# EAGLE board SparkFun_XBee_Development_Board-Panel (EAGLE 9.6.2), part 1 of 3
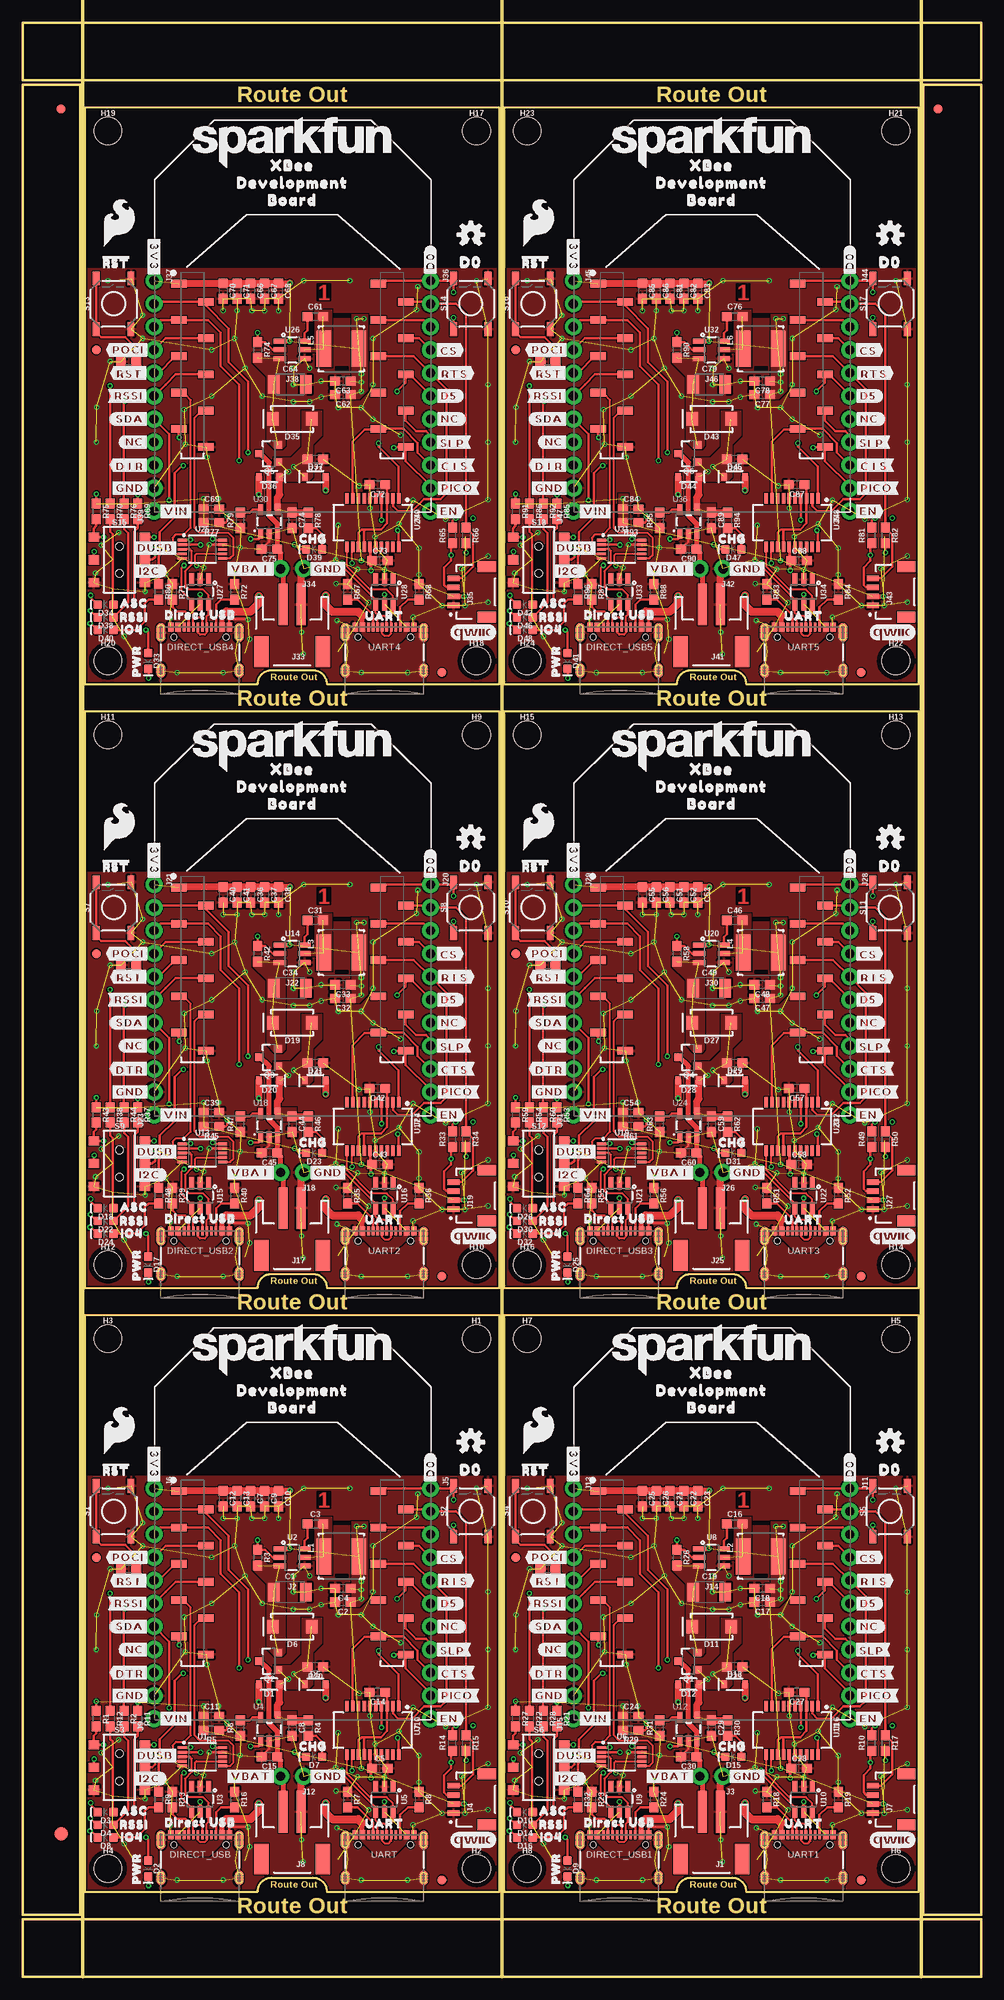
[diagram p0: board, top side]
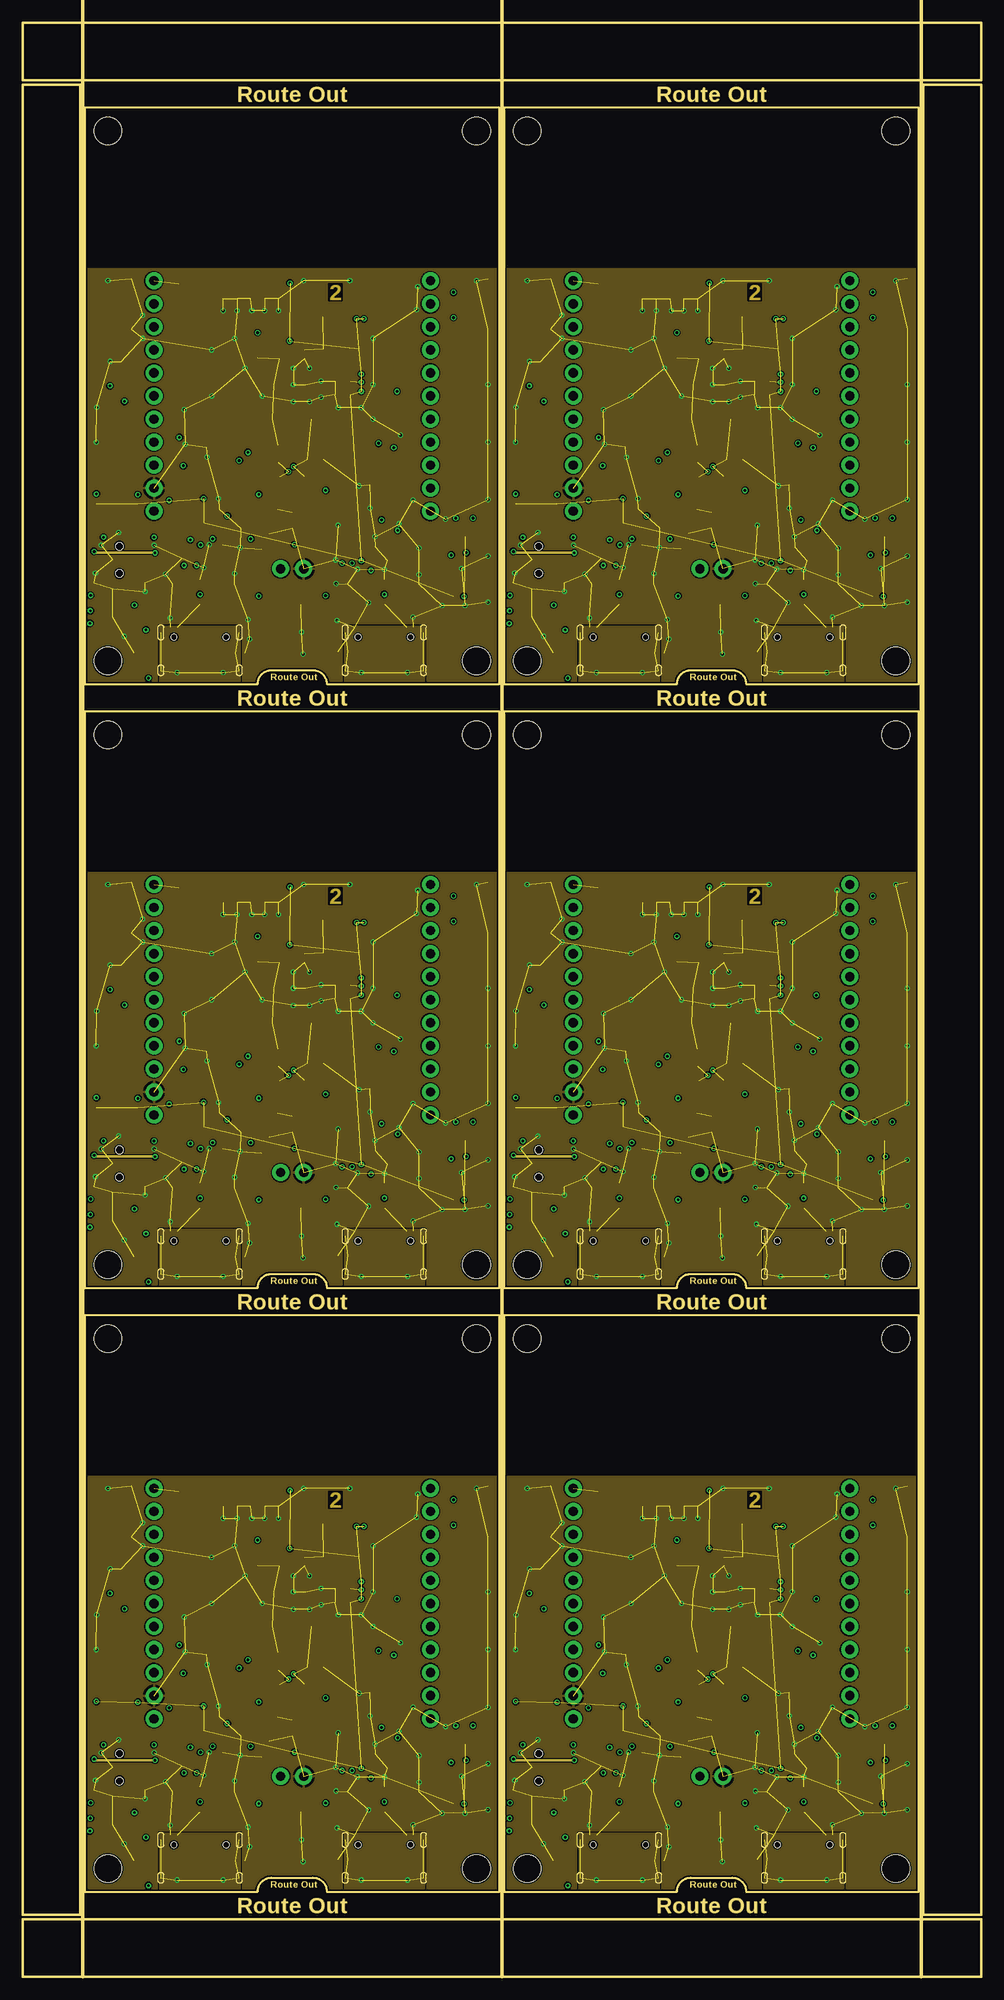
[diagram p1: board, inner layer Route2]
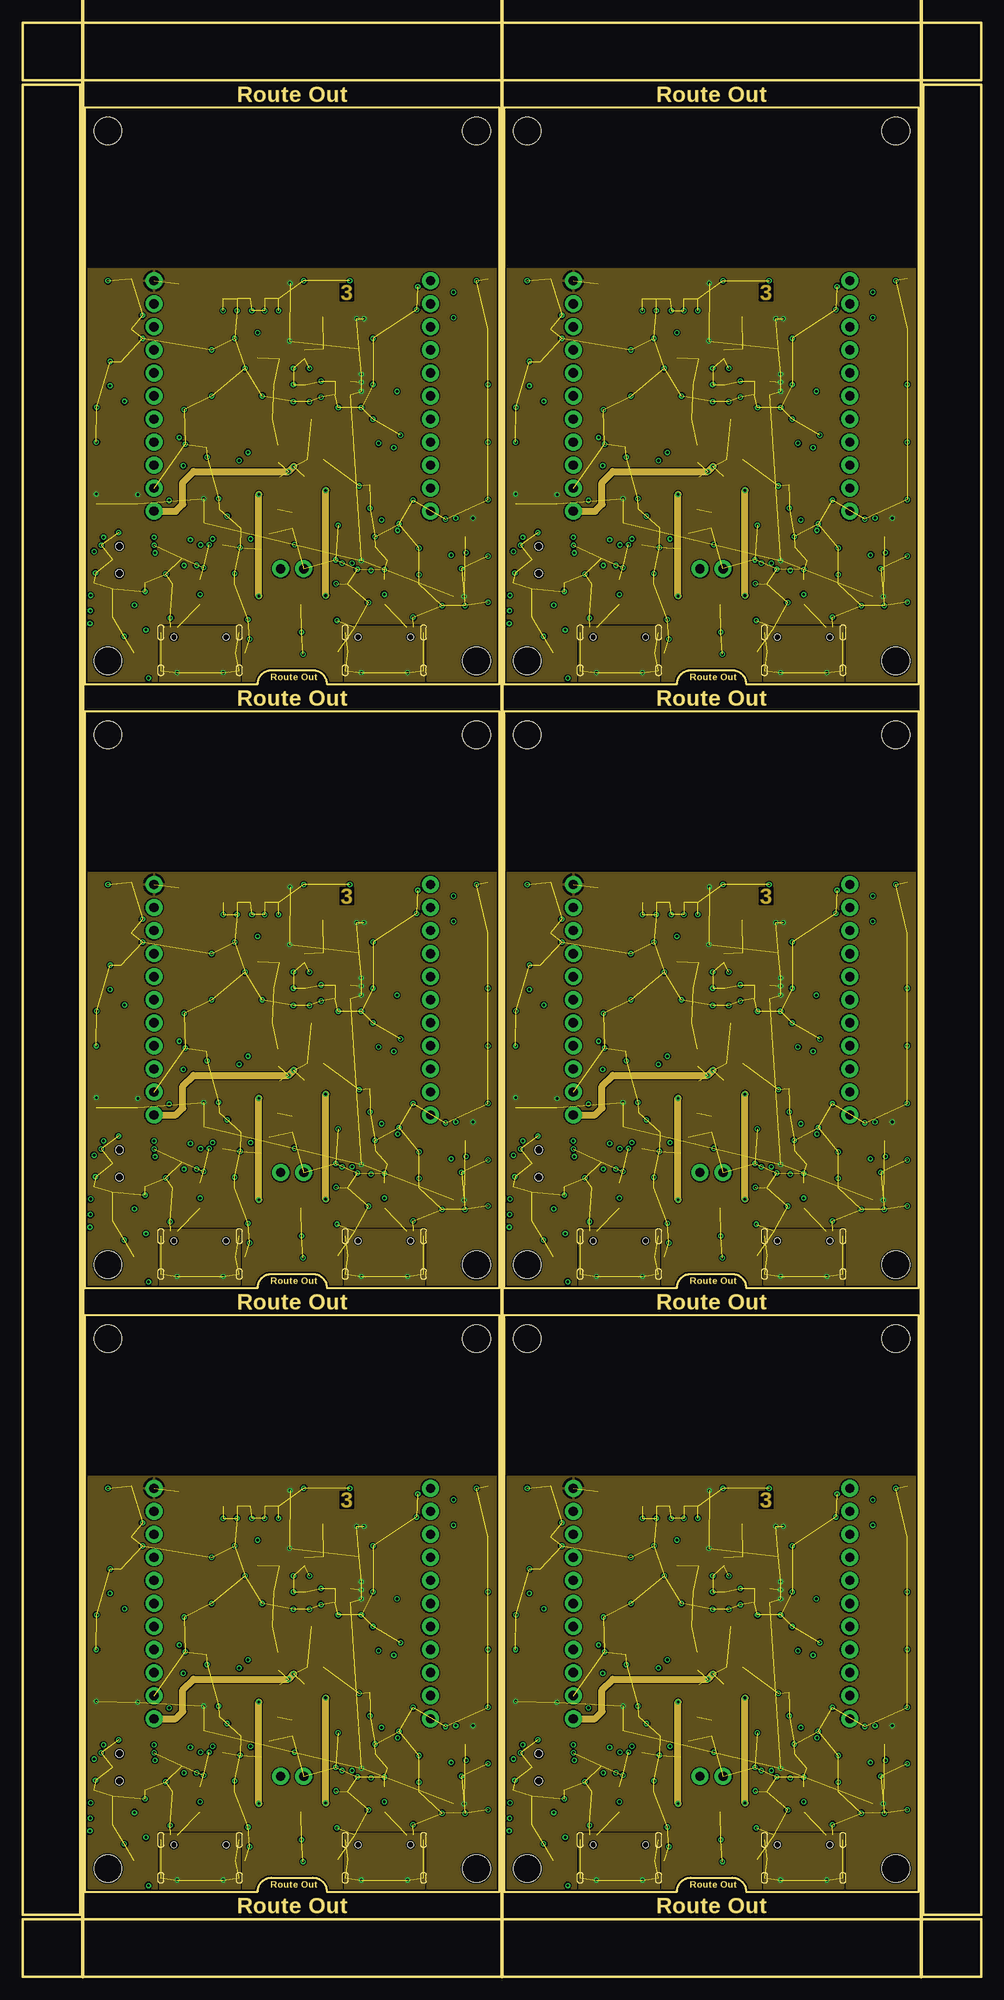
[diagram p2: board, inner layer Route15]
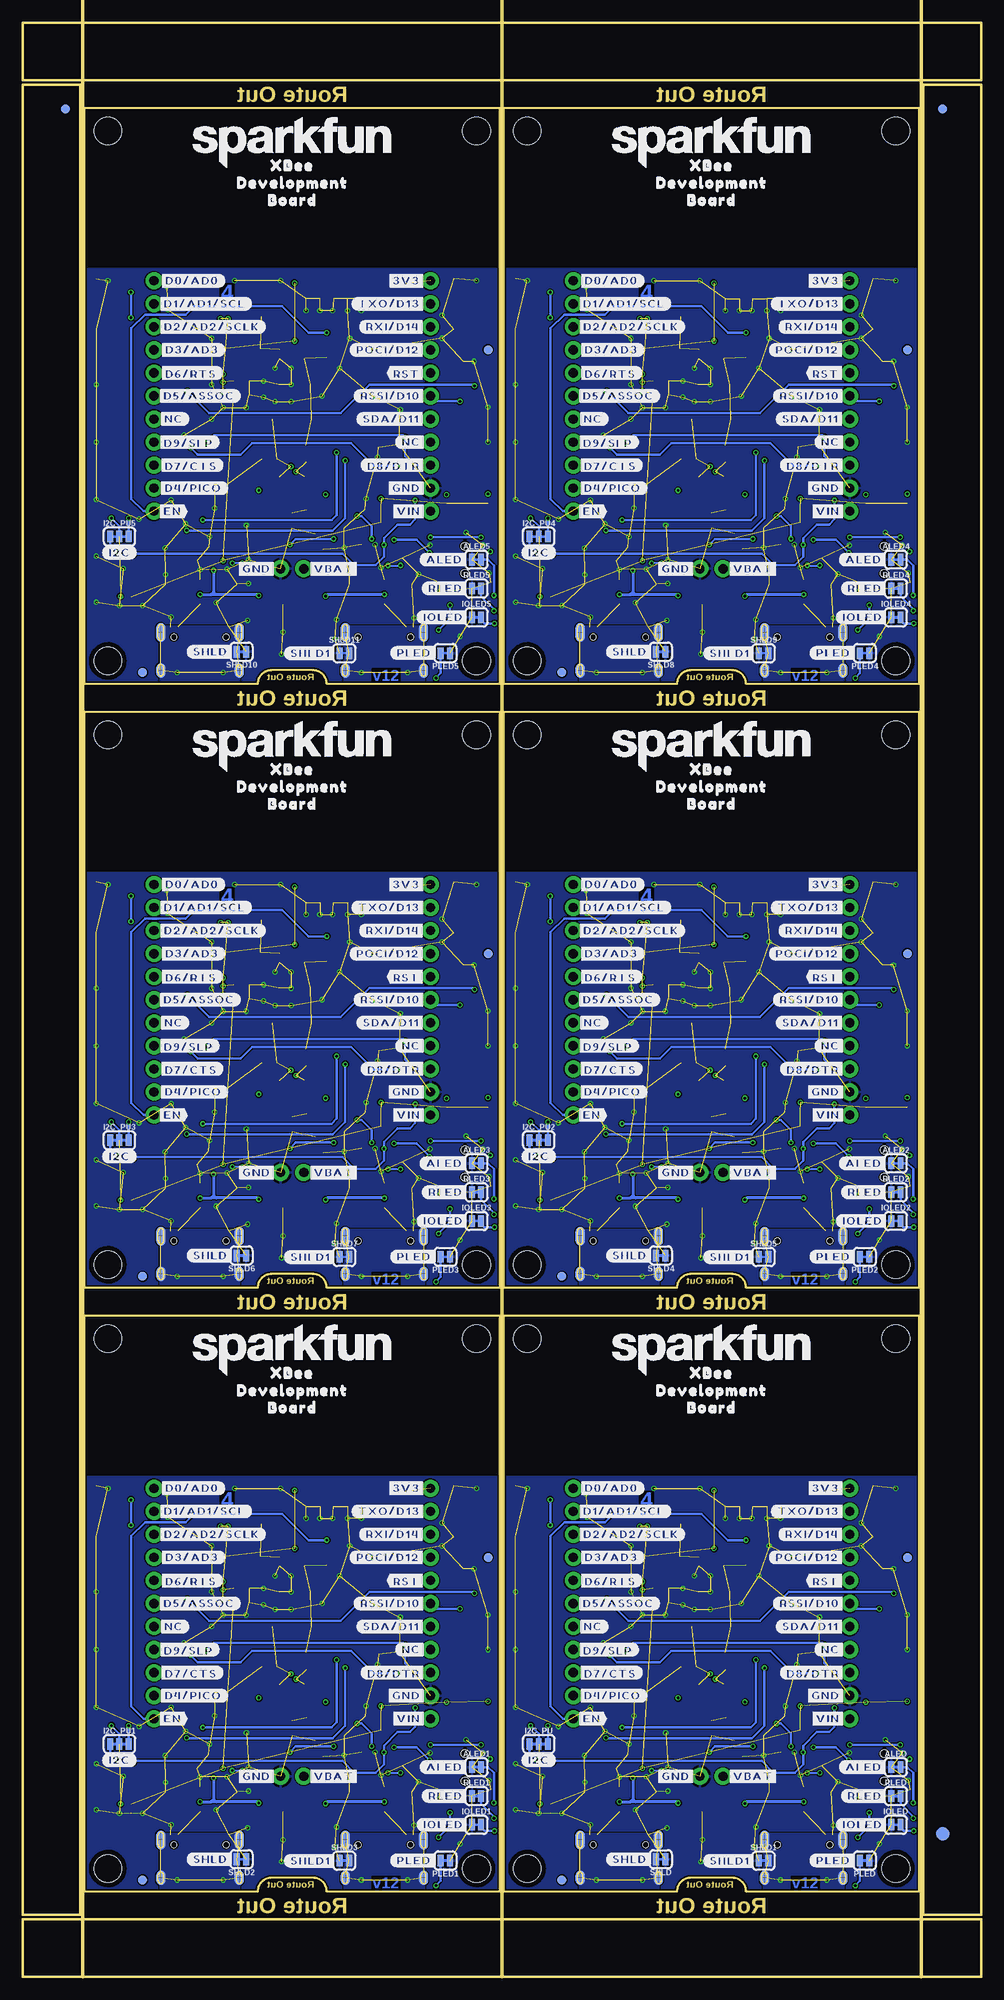
[diagram p3: board, bottom side, seen from below]

Size 105.66 x 215.39 mm. Coordinates in mm from the lower left corner, seen from the top.
Outline: 6.86,72.9 6.86,9.4 25.91,9.4 arc-90 27.43,10.92 32,10.92 arc-90 33.53,9.4 52.58,9.4 52.58,72.9 6.86,72.9
Outline: 53.09,72.9 53.09,9.4 72.14,9.4 arc-90 73.66,10.92 78.23,10.92 arc-90 79.76,9.4 98.81,9.4 98.81,72.9 53.09,72.9
Outline: 6.86,139.45 6.86,75.95 25.91,75.95 arc-90 27.43,77.47 32,77.47 arc-90 33.53,75.95 52.58,75.95 52.58,139.45 6.86,139.45
Outline: 53.09,139.45 53.09,75.95 72.14,75.95 arc-90 73.66,77.47 78.23,77.47 arc-90 79.76,75.95 98.81,75.95 98.81,139.45 53.09,139.45
Outline: 6.86,205.99 6.86,142.49 25.91,142.49 arc-90 27.43,144.02 32,144.02 arc-90 33.53,142.49 52.58,142.49 52.58,205.99 6.86,205.99
Outline: 53.09,205.99 53.09,142.49 72.14,142.49 arc-90 73.66,144.02 78.23,144.02 arc-90 79.76,142.49 98.81,142.49 98.81,205.99 53.09,205.99
Outline: 0,6.35 105.66,6.35 105.66,0 0,0 0,6.35
Outline: 99.31,208.53 105.66,208.53 105.66,6.86 99.31,6.86 99.31,208.53
Outline: 0,215.39 105.66,215.39 105.66,209.04 0,209.04 0,215.39
Outline: 0,208.53 6.35,208.53 6.35,6.86 0,6.86 0,208.53
Copper layers (1*2*15*16): Top 0.035559375mm / dielectric 0.47751875mm / Route2 0.035559375mm / dielectric 0.47751875mm / Route15 0.035559375mm / dielectric 0.47751875mm / Bottom 0.035559375mm
Design rules "SparkFun_XBee_Development_Board": minimum track width 5mil, minimum drill 0.2mm, track to track 5mil, track to pad 5mil, pad to pad 5mil, via to via 5mil, smd to smd 5mil, copper to edge 7mil, drill to drill 7mil, minimum pad ring 5mil, minimum via ring 5mil, stop-mask expansion 2.5mil, vias tented up to drill 25mil, thermal gap 10mil
Net classes: 1 POWER: width 0.559 mm, drill 0.305 mm; 2 Diff pairs: width 0.203 mm, drill 0.305 mm, clearance 0.152 mm
tRestrict: area 34.4,49.9 to 35.9,50.2; area 34.5,44.1 to 35.8,44.3; area 80.6,49.9 to 82.2,50.2; area 80.8,44.1 to 82,44.3; area 34.4,116.5 to 35.9,116.7; area 34.5,110.6 to 35.8,110.9; area 80.6,116.5 to 82.2,116.7; area 80.8,110.6 to 82,110.9; area 34.4,183 to 35.9,183.3; area 34.5,177.2 to 35.8,177.4; area 80.6,183 to 82.2,183.3; area 80.8,177.2 to 82,177.4
Milling: 4 lines

## Footprints (pad centres in the part's own frame; a part is rotated, then mirrored left to right if it is on the bottom)
SMT-JUMPER_2_NC_TRACE_SILK = smd 0.66 x 1.27: 1 -0.521,0; 2 0.521,0
1210 = smd 1.27 x 2.06: 1 -1.755,0; 2 1.755,0
0603 = smd 1.1 x 1: 1 -0.85,0; 2 0.85,0
SOD-323 = smd 0.63 x 0.83: A 1.15,0; C -1.15,0
LED-0603 = smd 1 x 1: A -0.877,0; C 0.877,0
SMA-DIODE = smd 1.27 x 1.47: A -2.15,0; C 2.15,0
USB-C-16P-4LAYER-ISOLATED = smd 0.3 x 1: A5 -1.25,-0.34; A6 -0.25,-0.34; A7 0.25,-0.34; A8 1.25,-0.34; B5 1.75,-0.34; B6 0.75,-0.34; B7 -0.75,-0.34; B8 -1.75,-0.34 | smd 0.6 x 1: GND -3.225,-0.34; GND2 3.225,-0.34; VBUS1 -2.45,-0.34; VBUS2 2.45,-0.34 | smd 1 x 2.1: SHLD1 -4.32,-0.915; SHLD2 4.32,-0.915 | smd 1 x 2.1 bottom: SHLD3 -4.32,-0.915; SHLD4 4.32,-0.915 | smd 1 x 1.6: SHLD5 -4.32,-5.095; SHLD8 4.32,-5.095 | smd 1 x 1.6 bottom: SHLD6 -4.32,-5.095; SHLD7 4.32,-5.095 | hole 0.65: -2.89,-1.445; 2.89,-1.445
FIDUCIAL-1X2 = smd 1 x 1: 1 0,0
FIDUCIAL-1.5X3 = smd 1.5 x 1.5: 1 0,0
STAND-OFF-TIGHT = hole 3.048: 0,0
SMT-JUMPER_3_2-NC_TRACE_SILK = smd 0.66 x 1.27: 1 -1.041,0; 2 0,0; 3 1.041,0
JST-2-SMD = smd 1 x 4.6: 1 -1,-3.7; 2 1,-3.7 | smd 1.6 x 3.4: NC1 -3.4,1.5; NC2 3.4,1.5
XBEE3-SMD = smd 1.7 x 0.85: 1 -12.5,11.11; 2 -9.5,9.11; 3 -12.5,7.11; 4 -9.5,5.11; 5 -12.5,3.11; 6 -9.5,1.11; 7 -12.5,-0.89; 8 -9.5,-2.89; 9 -12.5,-4.89; 10 -9.5,-6.89; 11 12.5,-6.89; 12 9.5,-4.89; 13 12.5,-2.89; 14 9.5,-0.89; 15 12.5,1.11; 16 9.5,3.11; 17 12.5,5.11; 18 9.5,7.11; 19 12.5,9.11; 20 9.5,11.11
1X02_NO_SILK = drill 1.016 pad 1.88: 1 0,0; 2 2.54,0
JST04_1MM_RA = smd 0.6 x 1.35: 1 -1.5,0; 2 -0.5,0; 3 0.5,0; 4 1.5,0 | smd 1.2 x 2: NC1 2.8,-3.675; NC2 -2.8,-3.675
1X10_NO_SILK = drill 1.016 pad 1.88: 1 0,0; 2 2.54,0; 3 5.08,0; 4 7.62,0; 5 10.16,0; 6 12.7,0; 7 15.24,0; 8 17.78,0; 9 20.32,0; 10 22.86,0
1X01_NO_SILK_STAND = drill 1.016 pad 1.88: 1 0,0
INDUCTOR_3.9UH = smd 4 x 1.6: P$1 0,-2; P$2 0,1.9
SOT23-3 = smd 0.8 x 0.9: 1 -0.95,-1; 2 0.95,-1; 3 0,1.1
TACTILE_SWITCH_SMD_5.2MM = smd 1.524 x 0.762: 1 -2.794,1.905; 2 2.794,1.905; 3 -2.794,-1.905; 4 2.794,-1.905
SWITCH_DPDT_SMD_AYZ0202 = smd 1 x 1.15: 1 -2.5,2.825; 2 0,2.825; 3 2.5,2.825; 4 -2.5,-2.825; 5 0,-2.825; 6 2.5,-2.825 | hole 0.85: 1.5,0; -1.5,0
MSOP10 = smd 1 x 0.3: 1 -2.25,1; 2 -2.25,0.5; 3 -2.25,0; 4 -2.25,-0.5; 5 -2.25,-1; 6 2.25,-1; 7 2.25,-0.5; 8 2.25,0; 9 2.25,0.5; 10 2.25,1
SOT23-6 = smd 0.55 x 1.35: 1 -0.95,-1.375; 2 0,-1.375; 3 0.95,-1.375; 4 0.95,1.375; 5 0,1.375; 6 -0.95,1.375
SOT-23-6 = smd 0.55 x 1.35: 1 -0.95,-1.375; 2 0,-1.375; 3 0.95,-1.375; 4 0.95,1.375; 5 0,1.375; 6 -0.95,1.375
SOT23-5 = smd 0.55 x 1.2: 1 -0.95,-1.3; 2 0,-1.3; 3 0.95,-1.3; 4 0.95,1.3; 5 -0.95,1.3
SSOP20_L = smd 0.381 x 1.143: 1 -2.857,-2.68; 2 -2.223,-2.68; 3 -1.587,-2.68; 4 -0.953,-2.68; 5 -0.318,-2.68; 6 0.318,-2.68; 7 0.953,-2.68; 8 1.587,-2.68; 9 2.223,-2.68; 10 2.857,-2.68; 11 2.857,2.68; 12 2.223,2.68; 13 1.587,2.68; 14 0.953,2.68; 15 0.318,2.68; 16 -0.318,2.68; 17 -0.953,2.68; 18 -1.587,2.68; 19 -2.223,2.68; 20 -2.857,2.68

## Placement (x,y rotation side)
ALED  JUMPER-SMT_2_NC_TRACE_SILK  [SMT-JUMPER_2_NC_TRACE_SILK]  9.4,23.11 0 bottom
ALED1  JUMPER-SMT_2_NC_TRACE_SILK  [SMT-JUMPER_2_NC_TRACE_SILK]  55.63,23.11 0 bottom
ALED2  JUMPER-SMT_2_NC_TRACE_SILK  [SMT-JUMPER_2_NC_TRACE_SILK]  9.4,89.66 0 bottom
ALED3  JUMPER-SMT_2_NC_TRACE_SILK  [SMT-JUMPER_2_NC_TRACE_SILK]  55.63,89.66 0 bottom
ALED4  JUMPER-SMT_2_NC_TRACE_SILK  [SMT-JUMPER_2_NC_TRACE_SILK]  9.4,156.21 0 bottom
ALED5  JUMPER-SMT_2_NC_TRACE_SILK  [SMT-JUMPER_2_NC_TRACE_SILK]  55.63,156.21 0 bottom
C1  10uF  [1210]  29.46,42.42 0 top
C2  22uF  [0603]  35.31,41.3 180 top
C3  0.1uF  [0603]  32.26,49.91 0 top
C4  22uF  [0603]  35.31,42.8 180 top
C5  0.1uF  [0603]  39.37,22.99 0 top
C6  10nF  [0603]  11.68,44.96 180 top
C7  10nF  [0603]  25.15,52.7 270 top
C8  4.7uF  [0603]  29.72,27.43 270 top
C9  0.1uF  [0603]  26.67,52.7 270 top
C10  10uF  [0603]  28.19,52.7 270 top
C11  0.1uF  [0603]  20.83,28.7 0 top
C12  10pF  [0603]  22.1,52.7 270 top
C13  47pF  [0603]  23.62,52.7 270 top
C14  0.1uF  [0603]  39.12,31.37 180 top
C15  4.7uF  [0603]  27.18,24.26 180 top
C16  0.1uF  [0603]  78.49,49.91 0 top
C17  22uF  [0603]  81.53,41.3 180 top
C18  22uF  [0603]  81.53,42.8 180 top
C19  10uF  [1210]  75.69,42.42 0 top
C20  10nF  [0603]  57.91,44.96 180 top
C21  10nF  [0603]  71.37,52.7 270 top
C22  0.1uF  [0603]  72.9,52.7 270 top
C23  10uF  [0603]  74.42,52.7 270 top
C24  0.1uF  [0603]  67.06,28.7 0 top
C25  10pF  [0603]  68.33,52.7 270 top
C26  47pF  [0603]  69.85,52.7 270 top
C27  0.1uF  [0603]  85.34,31.37 180 top
C28  0.1uF  [0603]  85.6,22.99 0 top
C29  4.7uF  [0603]  75.95,27.43 270 top
C30  4.7uF  [0603]  73.41,24.26 180 top
C31  0.1uF  [0603]  32.26,116.46 0 top
C32  22uF  [0603]  35.31,107.85 180 top
C33  22uF  [0603]  35.31,109.35 180 top
C34  10uF  [1210]  29.46,108.97 0 top
C35  10nF  [0603]  11.68,111.51 180 top
C36  10nF  [0603]  25.15,119.25 270 top
C37  0.1uF  [0603]  26.67,119.25 270 top
C38  10uF  [0603]  28.19,119.25 270 top
C39  0.1uF  [0603]  20.83,95.25 0 top
C40  10pF  [0603]  22.1,119.25 270 top
C41  47pF  [0603]  23.62,119.25 270 top
C42  0.1uF  [0603]  39.12,97.92 180 top
C43  0.1uF  [0603]  39.37,89.53 0 top
C44  4.7uF  [0603]  29.72,93.98 270 top
C45  4.7uF  [0603]  27.18,90.8 180 top
C46  0.1uF  [0603]  78.49,116.46 0 top
C47  22uF  [0603]  81.53,107.85 180 top
C48  22uF  [0603]  81.53,109.35 180 top
C49  10uF  [1210]  75.69,108.97 0 top
C50  10nF  [0603]  57.91,111.51 180 top
C51  10nF  [0603]  71.37,119.25 270 top
C52  0.1uF  [0603]  72.9,119.25 270 top
C53  10uF  [0603]  74.42,119.25 270 top
C54  0.1uF  [0603]  67.06,95.25 0 top
C55  10pF  [0603]  68.33,119.25 270 top
C56  47pF  [0603]  69.85,119.25 270 top
C57  0.1uF  [0603]  85.34,97.92 180 top
C58  0.1uF  [0603]  85.6,89.53 0 top
C59  4.7uF  [0603]  75.95,93.98 270 top
C60  4.7uF  [0603]  73.41,90.8 180 top
C61  0.1uF  [0603]  32.26,183.01 0 top
C62  22uF  [0603]  35.31,174.4 180 top
C63  22uF  [0603]  35.31,175.9 180 top
C64  10uF  [1210]  29.46,175.51 0 top
C65  10nF  [0603]  11.68,178.05 180 top
C66  10nF  [0603]  25.15,185.8 270 top
C67  0.1uF  [0603]  26.67,185.8 270 top
C68  10uF  [0603]  28.19,185.8 270 top
C69  0.1uF  [0603]  20.83,161.8 0 top
C70  10pF  [0603]  22.1,185.8 270 top
C71  47pF  [0603]  23.62,185.8 270 top
C72  0.1uF  [0603]  39.12,164.47 180 top
C73  0.1uF  [0603]  39.37,156.08 0 top
C74  4.7uF  [0603]  29.72,160.53 270 top
C75  4.7uF  [0603]  27.18,157.35 180 top
C76  0.1uF  [0603]  78.49,183.01 0 top
C77  22uF  [0603]  81.53,174.4 180 top
C78  22uF  [0603]  81.53,175.9 180 top
C79  10uF  [1210]  75.69,175.51 0 top
C80  10nF  [0603]  57.91,178.05 180 top
C81  10nF  [0603]  71.37,185.8 270 top
C82  0.1uF  [0603]  72.9,185.8 270 top
C83  10uF  [0603]  74.42,185.8 270 top
C84  0.1uF  [0603]  67.06,161.8 0 top
C85  10pF  [0603]  68.33,185.8 270 top
C86  47pF  [0603]  69.85,185.8 270 top
C87  0.1uF  [0603]  85.34,164.47 180 top
C88  0.1uF  [0603]  85.6,156.08 0 top
C89  4.7uF  [0603]  75.95,160.53 270 top
C90  4.7uF  [0603]  73.41,157.35 180 top
D1  3A/10V/280mV  [SOD-323]  27.18,32.26 180 top
D2  RED  [LED-0603]  13.84,11.94 270 top
D3  BLUE  [LED-0603]  9.14,18.16 180 top
D4  Yellow  [LED-0603]  9.14,16.76 180 top
D5  3A/10V/280mV  [SOD-323]  32.26,32.26 0 top
D6  3A/40V/500mV  [SMA-DIODE]  29.72,38.61 180 top
D7  Yellow  [LED-0603]  32.13,24.26 180 top
D8  GREEN  [LED-0603]  9.14,15.37 180 top
D9  RED  [LED-0603]  60.07,11.94 270 top
D10  BLUE  [LED-0603]  55.37,18.16 180 top
D11  3A/40V/500mV  [SMA-DIODE]  75.95,38.61 180 top
D12  3A/10V/280mV  [SOD-323]  73.41,32.26 180 top
D13  3A/10V/280mV  [SOD-323]  78.49,32.26 0 top
D14  Yellow  [LED-0603]  55.37,16.76 180 top
D15  Yellow  [LED-0603]  78.36,24.26 180 top
D16  GREEN  [LED-0603]  55.37,15.37 180 top
D17  RED  [LED-0603]  13.84,78.49 270 top
D18  BLUE  [LED-0603]  9.14,84.71 180 top
D19  3A/40V/500mV  [SMA-DIODE]  29.72,105.16 180 top
D20  3A/10V/280mV  [SOD-323]  27.18,98.81 180 top
D21  3A/10V/280mV  [SOD-323]  32.26,98.81 0 top
D22  Yellow  [LED-0603]  9.14,83.31 180 top
D23  Yellow  [LED-0603]  32.13,90.8 180 top
D24  GREEN  [LED-0603]  9.14,81.91 180 top
D25  RED  [LED-0603]  60.07,78.49 270 top
D26  BLUE  [LED-0603]  55.37,84.71 180 top
D27  3A/40V/500mV  [SMA-DIODE]  75.95,105.16 180 top
D28  3A/10V/280mV  [SOD-323]  73.41,98.81 180 top
D29  3A/10V/280mV  [SOD-323]  78.49,98.81 0 top
D30  Yellow  [LED-0603]  55.37,83.31 180 top
D31  Yellow  [LED-0603]  78.36,90.8 180 top
D32  GREEN  [LED-0603]  55.37,81.91 180 top
D33  RED  [LED-0603]  13.84,145.03 270 top
D34  BLUE  [LED-0603]  9.14,151.26 180 top
D35  3A/40V/500mV  [SMA-DIODE]  29.72,171.7 180 top
D36  3A/10V/280mV  [SOD-323]  27.18,165.35 180 top
D37  3A/10V/280mV  [SOD-323]  32.26,165.35 0 top
D38  Yellow  [LED-0603]  9.14,149.86 180 top
D39  Yellow  [LED-0603]  32.13,157.35 180 top
D40  GREEN  [LED-0603]  9.14,148.46 180 top
D41  RED  [LED-0603]  60.07,145.03 270 top
D42  BLUE  [LED-0603]  55.37,151.26 180 top
D43  3A/40V/500mV  [SMA-DIODE]  75.95,171.7 180 top
D44  3A/10V/280mV  [SOD-323]  73.41,165.35 180 top
D45  3A/10V/280mV  [SOD-323]  78.49,165.35 0 top
D46  Yellow  [LED-0603]  55.37,149.86 180 top
D47  Yellow  [LED-0603]  78.36,157.35 180 top
D48  GREEN  [LED-0603]  55.37,148.46 180 top
DIRECT_USB  USB Female Type C Connector  [USB-C-16P-4LAYER-ISOLATED]  19.56,16 0 top
DIRECT_USB1  USB Female Type C Connector  [USB-C-16P-4LAYER-ISOLATED]  65.79,16 0 top
DIRECT_USB2  USB Female Type C Connector  [USB-C-16P-4LAYER-ISOLATED]  19.56,82.55 0 top
DIRECT_USB3  USB Female Type C Connector  [USB-C-16P-4LAYER-ISOLATED]  65.79,82.55 0 top
DIRECT_USB4  USB Female Type C Connector  [USB-C-16P-4LAYER-ISOLATED]  19.56,149.1 0 top
DIRECT_USB5  USB Female Type C Connector  [USB-C-16P-4LAYER-ISOLATED]  65.79,149.1 0 top
E$1  [FIDUCIAL-1X2]  4.23,205.87 0 top
E$2  [FIDUCIAL-1X2]  4.23,205.87 0 bottom
E$3  [FIDUCIAL-1X2]  100.92,205.87 0 top
E$4  [FIDUCIAL-1X2]  100.92,205.87 0 bottom
E$5  [FIDUCIAL-1.5X3]  4.23,15.75 0 top
E$6  [FIDUCIAL-1.5X3]  4.23,15.75 0 bottom
FD1  FIDUCIAL1X2  [FIDUCIAL-1X2]  8.13,46.23 0 top
FD2  FIDUCIAL1X2  [FIDUCIAL-1X2]  8.13,46.23 0 bottom
FD3  FIDUCIAL1X2  [FIDUCIAL-1X2]  46.23,10.67 0 top
FD4  FIDUCIAL1X2  [FIDUCIAL-1X2]  46.23,10.67 0 bottom
FD5  FIDUCIAL1X2  [FIDUCIAL-1X2]  54.36,46.23 0 top
FD6  FIDUCIAL1X2  [FIDUCIAL-1X2]  54.36,46.23 0 bottom
FD7  FIDUCIAL1X2  [FIDUCIAL-1X2]  92.46,10.67 0 top
FD8  FIDUCIAL1X2  [FIDUCIAL-1X2]  92.46,10.67 0 bottom
FD9  FIDUCIAL1X2  [FIDUCIAL-1X2]  8.13,112.78 0 top
FD10  FIDUCIAL1X2  [FIDUCIAL-1X2]  8.13,112.78 0 bottom
FD11  FIDUCIAL1X2  [FIDUCIAL-1X2]  46.23,77.22 0 top
FD12  FIDUCIAL1X2  [FIDUCIAL-1X2]  46.23,77.22 0 bottom
FD13  FIDUCIAL1X2  [FIDUCIAL-1X2]  54.36,112.78 0 top
FD14  FIDUCIAL1X2  [FIDUCIAL-1X2]  54.36,112.78 0 bottom
FD15  FIDUCIAL1X2  [FIDUCIAL-1X2]  92.46,77.22 0 top
FD16  FIDUCIAL1X2  [FIDUCIAL-1X2]  92.46,77.22 0 bottom
FD17  FIDUCIAL1X2  [FIDUCIAL-1X2]  8.13,179.32 0 top
FD18  FIDUCIAL1X2  [FIDUCIAL-1X2]  8.13,179.32 0 bottom
FD19  FIDUCIAL1X2  [FIDUCIAL-1X2]  46.23,143.76 0 top
FD20  FIDUCIAL1X2  [FIDUCIAL-1X2]  46.23,143.76 0 bottom
FD21  FIDUCIAL1X2  [FIDUCIAL-1X2]  54.36,179.32 0 top
FD22  FIDUCIAL1X2  [FIDUCIAL-1X2]  54.36,179.32 0 bottom
FD23  FIDUCIAL1X2  [FIDUCIAL-1X2]  92.46,143.76 0 top
FD24  FIDUCIAL1X2  [FIDUCIAL-1X2]  92.46,143.76 0 bottom
H1  STAND-OFFTIGHT  [STAND-OFF-TIGHT]  50.04,70.36 0 top
H2  STAND-OFFTIGHT  [STAND-OFF-TIGHT]  50.04,11.94 0 top
H3  STAND-OFFTIGHT  [STAND-OFF-TIGHT]  9.4,70.36 0 top
H4  STAND-OFFTIGHT  [STAND-OFF-TIGHT]  9.4,11.94 0 top
H5  STAND-OFFTIGHT  [STAND-OFF-TIGHT]  96.27,70.36 0 top
H6  STAND-OFFTIGHT  [STAND-OFF-TIGHT]  96.27,11.94 0 top
H7  STAND-OFFTIGHT  [STAND-OFF-TIGHT]  55.63,70.36 0 top
H8  STAND-OFFTIGHT  [STAND-OFF-TIGHT]  55.63,11.94 0 top
H9  STAND-OFFTIGHT  [STAND-OFF-TIGHT]  50.04,136.91 0 top
H10  STAND-OFFTIGHT  [STAND-OFF-TIGHT]  50.04,78.49 0 top
H11  STAND-OFFTIGHT  [STAND-OFF-TIGHT]  9.4,136.91 0 top
H12  STAND-OFFTIGHT  [STAND-OFF-TIGHT]  9.4,78.49 0 top
H13  STAND-OFFTIGHT  [STAND-OFF-TIGHT]  96.27,136.91 0 top
H14  STAND-OFFTIGHT  [STAND-OFF-TIGHT]  96.27,78.49 0 top
H15  STAND-OFFTIGHT  [STAND-OFF-TIGHT]  55.63,136.91 0 top
H16  STAND-OFFTIGHT  [STAND-OFF-TIGHT]  55.63,78.49 0 top
H17  STAND-OFFTIGHT  [STAND-OFF-TIGHT]  50.04,203.45 0 top
H18  STAND-OFFTIGHT  [STAND-OFF-TIGHT]  50.04,145.03 0 top
H19  STAND-OFFTIGHT  [STAND-OFF-TIGHT]  9.4,203.45 0 top
H20  STAND-OFFTIGHT  [STAND-OFF-TIGHT]  9.4,145.03 0 top
H21  STAND-OFFTIGHT  [STAND-OFF-TIGHT]  96.27,203.45 0 top
H22  STAND-OFFTIGHT  [STAND-OFF-TIGHT]  96.27,145.03 0 top
H23  STAND-OFFTIGHT  [STAND-OFF-TIGHT]  55.63,203.45 0 top
H24  STAND-OFFTIGHT  [STAND-OFF-TIGHT]  55.63,145.03 0 top
I2C_PU  JUMPER-SMT_3_2-NC_TRACE_SILK  [SMT-JUMPER_3_2-NC_TRACE_SILK]  48.77,25.65 0 bottom
I2C_PU1  JUMPER-SMT_3_2-NC_TRACE_SILK  [SMT-JUMPER_3_2-NC_TRACE_SILK]  95,25.65 0 bottom
I2C_PU2  JUMPER-SMT_3_2-NC_TRACE_SILK  [SMT-JUMPER_3_2-NC_TRACE_SILK]  48.77,92.2 0 bottom
I2C_PU3  JUMPER-SMT_3_2-NC_TRACE_SILK  [SMT-JUMPER_3_2-NC_TRACE_SILK]  95,92.2 0 bottom
I2C_PU4  JUMPER-SMT_3_2-NC_TRACE_SILK  [SMT-JUMPER_3_2-NC_TRACE_SILK]  48.77,158.75 0 bottom
I2C_PU5  JUMPER-SMT_3_2-NC_TRACE_SILK  [SMT-JUMPER_3_2-NC_TRACE_SILK]  95,158.75 0 bottom
IOLED  JUMPER-SMT_2_NC_TRACE_SILK  [SMT-JUMPER_2_NC_TRACE_SILK]  9.4,16.76 0 bottom
IOLED1  JUMPER-SMT_2_NC_TRACE_SILK  [SMT-JUMPER_2_NC_TRACE_SILK]  55.63,16.76 0 bottom
IOLED2  JUMPER-SMT_2_NC_TRACE_SILK  [SMT-JUMPER_2_NC_TRACE_SILK]  9.4,83.31 0 bottom
IOLED3  JUMPER-SMT_2_NC_TRACE_SILK  [SMT-JUMPER_2_NC_TRACE_SILK]  55.63,83.31 0 bottom
IOLED4  JUMPER-SMT_2_NC_TRACE_SILK  [SMT-JUMPER_2_NC_TRACE_SILK]  9.4,149.86 0 bottom
IOLED5  JUMPER-SMT_2_NC_TRACE_SILK  [SMT-JUMPER_2_NC_TRACE_SILK]  55.63,149.86 0 bottom
J1  [JST-2-SMD]  75.95,14.48 180 top
J2  [XBEE3-SMD]  29.72,42.42 0 top
J3  [1X02_NO_SILK]  77.22,22.1 180 top
J4  QWIIC_RIGHT_ANGLE  [JST04_1MM_RA]  47.5,19.56 90 top
J5  [1X10_NO_SILK]  44.96,53.85 270 top
J6  [1X10_NO_SILK]  14.48,53.85 270 top
J7  QWIIC_RIGHT_ANGLE  [JST04_1MM_RA]  93.73,19.56 90 top
J8  [JST-2-SMD]  29.72,14.48 180 top
J9  [1X01_NO_SILK_STAND]  14.48,28.45 90 top
J10  [1X01_NO_SILK_STAND]  44.96,28.45 90 top
J11  [1X10_NO_SILK]  91.19,53.85 270 top
J12  [1X02_NO_SILK]  30.99,22.1 180 top
J13  [1X10_NO_SILK]  60.71,53.85 270 top
J14  [XBEE3-SMD]  75.95,42.42 0 top
J15  [1X01_NO_SILK_STAND]  60.71,28.45 90 top
J16  [1X01_NO_SILK_STAND]  91.19,28.45 90 top
J17  [JST-2-SMD]  29.72,81.03 180 top
J18  [1X02_NO_SILK]  30.99,88.65 180 top
J19  QWIIC_RIGHT_ANGLE  [JST04_1MM_RA]  47.5,86.11 90 top
J20  [1X10_NO_SILK]  44.96,120.4 270 top
J21  [1X10_NO_SILK]  14.48,120.4 270 top
J22  [XBEE3-SMD]  29.72,108.97 0 top
J23  [1X01_NO_SILK_STAND]  14.48,95 90 top
J24  [1X01_NO_SILK_STAND]  44.96,95 90 top
J25  [JST-2-SMD]  75.95,81.03 180 top
J26  [1X02_NO_SILK]  77.22,88.65 180 top
J27  QWIIC_RIGHT_ANGLE  [JST04_1MM_RA]  93.73,86.11 90 top
J28  [1X10_NO_SILK]  91.19,120.4 270 top
J29  [1X10_NO_SILK]  60.71,120.4 270 top
J30  [XBEE3-SMD]  75.95,108.97 0 top
J31  [1X01_NO_SILK_STAND]  60.71,95 90 top
J32  [1X01_NO_SILK_STAND]  91.19,95 90 top
J33  [JST-2-SMD]  29.72,147.57 180 top
J34  [1X02_NO_SILK]  30.99,155.19 180 top
J35  QWIIC_RIGHT_ANGLE  [JST04_1MM_RA]  47.5,152.65 90 top
J36  [1X10_NO_SILK]  44.96,186.94 270 top
J37  [1X10_NO_SILK]  14.48,186.94 270 top
J38  [XBEE3-SMD]  29.72,175.51 0 top
J39  [1X01_NO_SILK_STAND]  14.48,161.54 90 top
J40  [1X01_NO_SILK_STAND]  44.96,161.54 90 top
J41  [JST-2-SMD]  75.95,147.57 180 top
J42  [1X02_NO_SILK]  77.22,155.19 180 top
J43  QWIIC_RIGHT_ANGLE  [JST04_1MM_RA]  93.73,152.65 90 top
J44  [1X10_NO_SILK]  91.19,186.94 270 top
J45  [1X10_NO_SILK]  60.71,186.94 270 top
J46  [XBEE3-SMD]  75.95,175.51 0 top
J47  [1X01_NO_SILK_STAND]  60.71,161.54 90 top
J48  [1X01_NO_SILK_STAND]  91.19,161.54 90 top
L1  3.9UH  [INDUCTOR_3.9UH]  35.18,46.36 270 top
L2  3.9UH  [INDUCTOR_3.9UH]  81.41,46.36 270 top
L3  3.9UH  [INDUCTOR_3.9UH]  35.18,112.9 270 top
L4  3.9UH  [INDUCTOR_3.9UH]  81.41,112.9 270 top
L5  3.9UH  [INDUCTOR_3.9UH]  35.18,179.45 270 top
L6  3.9UH  [INDUCTOR_3.9UH]  81.41,179.45 270 top
LOGO1  SFE_LOGO_NAME.2_INCH  [SFE_LOGO_NAME_.2]  29.72,69.09 0 top
LOGO2  OSHW-LOGOS  [OSHW-LOGO-S]  49.4,58.93 0 top
LOGO3  QWIIC_LOGO_5MM  [QWIIC_5MM]  49.66,15.11 0 top
LOGO4  OSHW-LOGOS  [OSHW-LOGO-S]  95.63,58.93 0 top
LOGO5  QWIIC_LOGO_5MM  [QWIIC_5MM]  95.89,15.11 0 top
LOGO6  SFE_LOGO_NAME.2_INCH  [SFE_LOGO_NAME_.2]  75.95,69.09 0 top
LOGO7  OSHW-LOGOS  [OSHW-LOGO-S]  49.4,125.48 0 top
LOGO8  QWIIC_LOGO_5MM  [QWIIC_5MM]  49.66,81.66 0 top
LOGO9  SFE_LOGO_NAME.2_INCH  [SFE_LOGO_NAME_.2]  29.72,135.64 0 top
LOGO10  OSHW-LOGOS  [OSHW-LOGO-S]  95.63,125.48 0 top
LOGO11  QWIIC_LOGO_5MM  [QWIIC_5MM]  95.89,81.66 0 top
LOGO12  SFE_LOGO_NAME.2_INCH  [SFE_LOGO_NAME_.2]  75.95,135.64 0 top
LOGO13  OSHW-LOGOS  [OSHW-LOGO-S]  49.4,192.02 0 top
LOGO14  QWIIC_LOGO_5MM  [QWIIC_5MM]  49.66,148.21 0 top
LOGO15  SFE_LOGO_NAME.2_INCH  [SFE_LOGO_NAME_.2]  29.72,202.18 0 top
LOGO16  OSHW-LOGOS  [OSHW-LOGO-S]  95.63,192.02 0 top
LOGO17  QWIIC_LOGO_5MM  [QWIIC_5MM]  95.89,148.21 0 top
LOGO18  SFE_LOGO_NAME.2_INCH  [SFE_LOGO_NAME_.2]  75.95,202.18 0 top
PLED  JUMPER-SMT_2_NC_TRACE_SILK  [SMT-JUMPER_2_NC_TRACE_SILK]  12.83,12.8 180 bottom
PLED1  JUMPER-SMT_2_NC_TRACE_SILK  [SMT-JUMPER_2_NC_TRACE_SILK]  59.05,12.8 180 bottom
PLED2  JUMPER-SMT_2_NC_TRACE_SILK  [SMT-JUMPER_2_NC_TRACE_SILK]  12.83,79.35 180 bottom
PLED3  JUMPER-SMT_2_NC_TRACE_SILK  [SMT-JUMPER_2_NC_TRACE_SILK]  59.05,79.35 180 bottom
PLED4  JUMPER-SMT_2_NC_TRACE_SILK  [SMT-JUMPER_2_NC_TRACE_SILK]  12.83,145.9 180 bottom
PLED5  JUMPER-SMT_2_NC_TRACE_SILK  [SMT-JUMPER_2_NC_TRACE_SILK]  59.05,145.9 180 bottom
Q1  3.1A/30V/105mΩ  [SOT23-3]  73.41,34.8 90 top
Q2  3.1A/30V/105mΩ  [SOT23-3]  27.18,34.8 90 top
Q3  3.1A/30V/105mΩ  [SOT23-3]  27.18,101.35 90 top
Q4  3.1A/30V/105mΩ  [SOT23-3]  73.41,101.35 90 top
Q5  3.1A/30V/105mΩ  [SOT23-3]  27.18,167.89 90 top
Q6  3.1A/30V/105mΩ  [SOT23-3]  73.41,167.89 90 top
R1  100k  [0603]  8.13,28.45 270 top
R2  2.2k  [0603]  11.18,28.45 270 top
R3  10k  [0603]  25.91,46.23 270 top
R4  4.7k  [0603]  31.5,27.43 270 top
R5  100  [0603]  20.83,27.18 180 top
R6  2.0k  [0603]  24,27.43 90 top
R7  5.1k  [0603]  35.81,19.56 270 top
R8  5.1k  [0603]  43.69,19.56 270 top
R9  330  [0603]  14.99,19.56 270 top
R10  2.2k  [0603]  93.6,25.78 90 top
R11  4.7k  [0603]  12.7,28.45 270 top
R12  2.2k  [0603]  9.65,28.45 270 top
R13  5.1k  [0603]  16.51,19.56 270 top
R14  2.2k  [0603]  47.37,25.78 90 top
R15  2.2k  [0603]  48.89,25.78 270 top
R16  5.1k  [0603]  23.37,19.56 270 top
R17  2.2k  [0603]  95.12,25.78 270 top
R18  5.1k  [0603]  82.04,19.56 270 top
R19  5.1k  [0603]  89.92,19.56 270 top
R20  10k  [0603]  32.26,34.16 180 top
R21  4.7k  [0603]  58.93,28.45 270 top
R22  2.2k  [0603]  55.88,28.45 270 top
R23  5.1k  [0603]  62.74,19.56 270 top
R24  5.1k  [0603]  69.6,19.56 270 top
R25  10k  [0603]  78.49,34.16 180 top
R26  10k  [0603]  72.14,46.23 270 top
R27  100k  [0603]  54.36,28.45 270 top
R28  2.2k  [0603]  57.4,28.45 270 top
R29  100  [0603]  67.06,27.18 180 top
R30  4.7k  [0603]  77.72,27.43 270 top
R31  2.0k  [0603]  70.23,27.43 90 top
R32  330  [0603]  61.21,19.56 270 top
R33  2.2k  [0603]  47.37,92.33 90 top
R34  2.2k  [0603]  48.89,92.33 270 top
R35  5.1k  [0603]  35.81,86.11 270 top
R36  5.1k  [0603]  43.69,86.11 270 top
R37  4.7k  [0603]  12.7,95 270 top
R38  2.2k  [0603]  9.65,95 270 top
R39  5.1k  [0603]  16.51,86.11 270 top
R40  5.1k  [0603]  23.37,86.11 270 top
R41  10k  [0603]  32.26,100.71 180 top
R42  10k  [0603]  25.91,112.78 270 top
R43  100k  [0603]  8.13,95 270 top
R44  2.2k  [0603]  11.18,95 270 top
R45  100  [0603]  20.83,93.73 180 top
R46  4.7k  [0603]  31.5,93.98 270 top
R47  2.0k  [0603]  24,93.98 90 top
R48  330  [0603]  14.99,86.11 270 top
R49  2.2k  [0603]  93.6,92.33 90 top
R50  2.2k  [0603]  95.12,92.33 270 top
R51  5.1k  [0603]  82.04,86.11 270 top
R52  5.1k  [0603]  89.92,86.11 270 top
R53  4.7k  [0603]  58.93,95 270 top
R54  2.2k  [0603]  55.88,95 270 top
R55  5.1k  [0603]  62.74,86.11 270 top
R56  5.1k  [0603]  69.6,86.11 270 top
R57  10k  [0603]  78.49,100.71 180 top
R58  10k  [0603]  72.14,112.78 270 top
R59  100k  [0603]  54.36,95 270 top
R60  2.2k  [0603]  57.4,95 270 top
R61  100  [0603]  67.06,93.73 180 top
R62  4.7k  [0603]  77.72,93.98 270 top
R63  2.0k  [0603]  70.23,93.98 90 top
R64  330  [0603]  61.21,86.11 270 top
R65  2.2k  [0603]  47.37,158.88 90 top
R66  2.2k  [0603]  48.89,158.88 270 top
R67  5.1k  [0603]  35.81,152.65 270 top
R68  5.1k  [0603]  43.69,152.65 270 top
R69  4.7k  [0603]  12.7,161.54 270 top
R70  2.2k  [0603]  9.65,161.54 270 top
R71  5.1k  [0603]  16.51,152.65 270 top
R72  5.1k  [0603]  23.37,152.65 270 top
R73  10k  [0603]  32.26,167.26 180 top
R74  10k  [0603]  25.91,179.32 270 top
R75  100k  [0603]  8.13,161.54 270 top
R76  2.2k  [0603]  11.18,161.54 270 top
R77  100  [0603]  20.83,160.27 180 top
R78  4.7k  [0603]  31.5,160.53 270 top
R79  2.0k  [0603]  24,160.53 90 top
R80  330  [0603]  14.99,152.65 270 top
R81  2.2k  [0603]  93.6,158.88 90 top
R82  2.2k  [0603]  95.12,158.88 270 top
R83  5.1k  [0603]  82.04,152.65 270 top
R84  5.1k  [0603]  89.92,152.65 270 top
R85  4.7k  [0603]  58.93,161.54 270 top
R86  2.2k  [0603]  55.88,161.54 270 top
R87  5.1k  [0603]  62.74,152.65 270 top
R88  5.1k  [0603]  69.6,152.65 270 top
R89  10k  [0603]  78.49,167.26 180 top
R90  10k  [0603]  72.14,179.32 270 top
R91  100k  [0603]  54.36,161.54 270 top
R92  2.2k  [0603]  57.4,161.54 270 top
R93  100  [0603]  67.06,160.27 180 top
R94  4.7k  [0603]  77.72,160.53 270 top
R95  2.0k  [0603]  70.23,160.53 90 top
R96  330  [0603]  61.21,152.65 270 top
RLED  JUMPER-SMT_2_NC_TRACE_SILK  [SMT-JUMPER_2_NC_TRACE_SILK]  9.4,19.94 0 bottom
RLED1  JUMPER-SMT_2_NC_TRACE_SILK  [SMT-JUMPER_2_NC_TRACE_SILK]  55.63,19.94 0 bottom
RLED2  JUMPER-SMT_2_NC_TRACE_SILK  [SMT-JUMPER_2_NC_TRACE_SILK]  9.4,86.49 0 bottom
RLED3  JUMPER-SMT_2_NC_TRACE_SILK  [SMT-JUMPER_2_NC_TRACE_SILK]  55.63,86.49 0 bottom
RLED4  JUMPER-SMT_2_NC_TRACE_SILK  [SMT-JUMPER_2_NC_TRACE_SILK]  9.4,153.03 0 bottom
RLED5  JUMPER-SMT_2_NC_TRACE_SILK  [SMT-JUMPER_2_NC_TRACE_SILK]  55.63,153.03 0 bottom
S1  [TACTILE_SWITCH_SMD_5.2MM]  10.03,51.31 90 top
S2  [TACTILE_SWITCH_SMD_5.2MM]  49.4,51.31 90 top
S3  [SWITCH_DPDT_SMD_AYZ0202]  10.67,23.09 270 top
S4  [TACTILE_SWITCH_SMD_5.2MM]  56.26,51.31 90 top
S5  [TACTILE_SWITCH_SMD_5.2MM]  95.63,51.31 90 top
S6  [SWITCH_DPDT_SMD_AYZ0202]  56.9,23.09 270 top
S7  [TACTILE_SWITCH_SMD_5.2MM]  10.03,117.86 90 top
S8  [TACTILE_SWITCH_SMD_5.2MM]  49.4,117.86 90 top
S9  [SWITCH_DPDT_SMD_AYZ0202]  10.67,89.64 270 top
S10  [TACTILE_SWITCH_SMD_5.2MM]  56.26,117.86 90 top
S11  [TACTILE_SWITCH_SMD_5.2MM]  95.63,117.86 90 top
S12  [SWITCH_DPDT_SMD_AYZ0202]  56.9,89.64 270 top
S13  [TACTILE_SWITCH_SMD_5.2MM]  10.03,184.4 90 top
S14  [TACTILE_SWITCH_SMD_5.2MM]  49.4,184.4 90 top
S15  [SWITCH_DPDT_SMD_AYZ0202]  10.67,156.18 270 top
S16  [TACTILE_SWITCH_SMD_5.2MM]  56.26,184.4 90 top
S17  [TACTILE_SWITCH_SMD_5.2MM]  95.63,184.4 90 top
S18  [SWITCH_DPDT_SMD_AYZ0202]  56.9,156.18 270 top
SHLD  JUMPER-SMT_2_NC_TRACE_SILK  [SMT-JUMPER_2_NC_TRACE_SILK]  35.31,12.95 180 bottom
SHLD1  JUMPER-SMT_2_NC_TRACE_SILK  [SMT-JUMPER_2_NC_TRACE_SILK]  23.98,12.8 0 bottom
SHLD2  JUMPER-SMT_2_NC_TRACE_SILK  [SMT-JUMPER_2_NC_TRACE_SILK]  81.53,12.95 180 bottom
SHLD3  JUMPER-SMT_2_NC_TRACE_SILK  [SMT-JUMPER_2_NC_TRACE_SILK]  70.21,12.8 0 bottom
SHLD4  JUMPER-SMT_2_NC_TRACE_SILK  [SMT-JUMPER_2_NC_TRACE_SILK]  35.31,79.5 180 bottom
SHLD5  JUMPER-SMT_2_NC_TRACE_SILK  [SMT-JUMPER_2_NC_TRACE_SILK]  23.98,79.35 0 bottom
SHLD6  JUMPER-SMT_2_NC_TRACE_SILK  [SMT-JUMPER_2_NC_TRACE_SILK]  81.53,79.5 180 bottom
SHLD7  JUMPER-SMT_2_NC_TRACE_SILK  [SMT-JUMPER_2_NC_TRACE_SILK]  70.21,79.35 0 bottom
SHLD8  JUMPER-SMT_2_NC_TRACE_SILK  [SMT-JUMPER_2_NC_TRACE_SILK]  35.31,146.05 180 bottom
SHLD9  JUMPER-SMT_2_NC_TRACE_SILK  [SMT-JUMPER_2_NC_TRACE_SILK]  23.98,145.9 0 bottom
SHLD10  JUMPER-SMT_2_NC_TRACE_SILK  [SMT-JUMPER_2_NC_TRACE_SILK]  81.53,146.05 180 bottom
SHLD11  JUMPER-SMT_2_NC_TRACE_SILK  [SMT-JUMPER_2_NC_TRACE_SILK]  70.21,145.9 0 bottom
U1  FSUSB30MUX_MSOP10  [MSOP10]  19.81,24.26 0 top
U2  AP63203  [SOT23-6]  29.72,46.23 270 top
U3  ESD Diode  [SOT-23-6]  19.56,19.56 180 top
U4  MCP73831  [SOT23-5]  27.18,27.3 0 top
U5  ESD Diode  [SOT-23-6]  39.88,19.56 180 top
U6  FSUSB30MUX_MSOP10  [MSOP10]  66.04,24.26 0 top
U7  FT231XS  [SSOP20_L]  38.61,27.18 180 top
U8  AP63203  [SOT23-6]  75.95,46.23 270 top
U9  ESD Diode  [SOT-23-6]  65.79,19.56 180 top
U10  ESD Diode  [SOT-23-6]  86.11,19.56 180 top
U11  FT231XS  [SSOP20_L]  84.84,27.18 180 top
U12  MCP73831  [SOT23-5]  73.41,27.3 0 top
U13  FSUSB30MUX_MSOP10  [MSOP10]  19.81,90.8 0 top
U14  AP63203  [SOT23-6]  29.72,112.78 270 top
U15  ESD Diode  [SOT-23-6]  19.56,86.11 180 top
U16  ESD Diode  [SOT-23-6]  39.88,86.11 180 top
U17  FT231XS  [SSOP20_L]  38.61,93.73 180 top
U18  MCP73831  [SOT23-5]  27.18,93.85 0 top
U19  FSUSB30MUX_MSOP10  [MSOP10]  66.04,90.8 0 top
U20  AP63203  [SOT23-6]  75.95,112.78 270 top
U21  ESD Diode  [SOT-23-6]  65.79,86.11 180 top
U22  ESD Diode  [SOT-23-6]  86.11,86.11 180 top
U23  FT231XS  [SSOP20_L]  84.84,93.73 180 top
U24  MCP73831  [SOT23-5]  73.41,93.85 0 top
U25  FSUSB30MUX_MSOP10  [MSOP10]  19.81,157.35 0 top
U26  AP63203  [SOT23-6]  29.72,179.32 270 top
U27  ESD Diode  [SOT-23-6]  19.56,152.65 180 top
U28  ESD Diode  [SOT-23-6]  39.88,152.65 180 top
U29  FT231XS  [SSOP20_L]  38.61,160.27 180 top
U30  MCP73831  [SOT23-5]  27.18,160.4 0 top
U31  FSUSB30MUX_MSOP10  [MSOP10]  66.04,157.35 0 top
U32  AP63203  [SOT23-6]  75.95,179.32 270 top
U33  ESD Diode  [SOT-23-6]  65.79,152.65 180 top
U34  ESD Diode  [SOT-23-6]  86.11,152.65 180 top
U35  FT231XS  [SSOP20_L]  84.84,160.27 180 top
U36  MCP73831  [SOT23-5]  73.41,160.4 0 top
U$1  [#D2#AD2#SCLK#19]  38.61,48.77 0 bottom
U$2  [##RST##15]  11.81,43.69 0 top
U$3  [##CS##19]  46.99,46.23 0 top
U$4  [##CTS##25]  47.62,33.53 0 top
U$5  [##DTR##27]  11.81,33.53 0 top
U$6  [#D1#AD1#SCL#8]  39.37,51.31 0 bottom
U$7  [##RTS##24]  47.62,43.69 0 top
U$8  [#EN#17]  46.99,28.45 0 top
U$9  [#3V3#1]  14.48,56.52 270 top
U$10  [#D0#18]  44.96,56.01 90 top
U$11  [#VBAT#5]  25.15,22.1 0 top
U$12  [#D3#AD3#22]  40.77,46.23 0 bottom
U$13  [#D4#PICO#24]  40.64,30.99 0 bottom
U$14  [#POCI#D12#24]  19.18,46.23 0 bottom
U$15  [#TXO#D13#13]  19.05,51.31 0 bottom
U$16  [#RXI#D14#15]  18.67,48.77 0 bottom
U$17  [##RST##15]  17.14,43.69 0 bottom
U$18  [#RSSI#D10#17]  18.92,41.15 0 bottom
U$19  [CHG47]  32,25.4 0 top
U$20  [#GND#0]  33.66,22.1 0 top
U$21  [#EN#17]  42.93,28.45 0 bottom
U$22  [#SDA#D11#8]  18.8,38.61 0 bottom
U$23  [XBEE339]  29.72,66.55 0 top
U$24  [#NC#1]  42.8,38.61 0 bottom
U$25  [#GND#0]  11.81,30.99 0 top
U$26  [#I2C#33]  48.77,23.88 0 bottom
U$27  [#ALED#21]  12.95,23.11 0 bottom
U$28  [#PICO#23]  47.88,30.99 0 top
U$29  [#POCI#23]  11.63,46.23 0 top
U$30  [#RST#30]  10.29,55.88 0 top
U$31  [#RSSI#16]  11.68,41.15 0 top
U$32  [#DUSB#31]  14.61,24.38 0 top
U$33  [IO46]  12.04,15.39 0 top
U$34  [#SDA#7]  11.81,38.61 0 top
U$35  [#SHLD#740]  38.73,12.95 0 bottom
U$36  [#SHLD1#741]  27.69,12.78 0 bottom
U$37  [#VBAT#5]  25.15,22.1 0 bottom
U$38  [#GND#0]  33.66,22.1 0 bottom
U$39  [#D5#3]  46.99,41.15 0 top
U$40  [D03]  49.4,55.88 0 top
U$41  [#VIN#4]  16.89,28.45 0 top
U$42  [PWR26]  12.55,11.91 90 top
U$43  [ASC32]  12.27,18.29 0 top
U$44  [#3V3#1]  17.14,53.85 0 bottom
U$45  [#GND#0]  17.14,30.99 0 bottom
U$46  [#VIN#4]  16.89,28.45 0 bottom
U$47  [##SLP##27]  47.37,36.07 0 top
U$48  [#NC#3]  16.64,36.07 0 bottom
U$49  [#I2C#31]  13.97,21.84 0 top
U$50  [XBEE339]  29.72,66.55 0 bottom
U$51  [DEVELOPMENT1345]  29.72,64.64 0 top
U$52  [BOARD1346]  29.72,62.74 0 top
U$53  [#D8##DTR##27]  18.54,33.53 0 bottom
U$54  [#PLED#20]  16.31,12.83 0 bottom
U$55  [#D0#AD0#18]  40.77,53.85 0 bottom
U$56  [#D5#ASSOC#24]  40,41.15 0 bottom
U$57  [#D6##RTS##24]  40.89,43.69 0 bottom
U$58  [#D7##CTS##25]  40.89,33.53 0 bottom
U$59  [#IOLED#23]  13.08,16.76 0 bottom
U$60  [#D9##SLP##27]  41.15,36.07 0 bottom
U$61  [SFE_LOGO_FLAME_.2]  10.67,60.2 0 top
U$62  [RSSI31]  12.27,16.76 0 top
U$63  [SFE_LOGO_NAME_.2]  29.72,69.09 0 bottom
U$64  [#RLED#22]  12.83,19.94 0 bottom
U$65  [UART32]  39.88,16.89 0 top
U$66  [#NC#3]  12.32,36.07 0 top
U$67  [#NC#1]  47.12,38.61 0 top
U$68  [DIRECT_USB33]  19.56,17.02 0 top
U$69  [##CS##19]  93.22,46.23 0 top
U$70  [DEVELOPMENT1345]  29.72,64.64 0 bottom
U$71  [BOARD1346]  29.72,62.74 0 bottom
U$72  [##CTS##25]  93.85,33.53 0 top
U$73  [##RTS##24]  93.85,43.69 0 top
U$74  [#3V3#1]  60.71,56.52 270 top
U$75  [#D0#18]  91.19,56.01 90 top
U$76  [#GND#0]  58.04,30.99 0 top
U$77  [#I2C#33]  95,23.88 0 bottom
U$78  [#PICO#23]  94.11,30.99 0 top
U$79  [#RSSI#16]  57.91,41.15 0 top
U$80  [#SDA#7]  58.04,38.61 0 top
U$81  [#GND#0]  79.88,22.1 0 bottom
U$82  [#D5#3]  93.22,41.15 0 top
U$83  [#VIN#4]  63.12,28.45 0 top
U$84  [PWR26]  58.78,11.91 90 top
U$85  [#3V3#1]  63.37,53.85 0 bottom
U$86  [#GND#0]  63.37,30.99 0 bottom
U$87  [#VIN#4]  63.12,28.45 0 bottom
U$88  [##SLP##27]  93.6,36.07 0 top
U$89  [#I2C#31]  60.2,21.84 0 top
U$90  [D03]  95.63,55.88 0 top
U$91  [##RST##15]  58.04,43.69 0 top
U$92  [#VBAT#5]  71.37,22.1 0 bottom
U$93  [#ALED#21]  59.18,23.11 0 bottom
U$94  [#PLED#20]  62.53,12.83 0 bottom
U$95  [#D0#AD0#18]  87,53.85 0 bottom
U$96  [#D3#AD3#22]  87,46.23 0 bottom
U$97  [#D4#PICO#24]  86.87,30.99 0 bottom
U$98  [#D5#ASSOC#24]  86.23,41.15 0 bottom
U$99  [#D6##RTS##24]  87.12,43.69 0 bottom
U$100  [#D7##CTS##25]  87.12,33.53 0 bottom
U$101  [#D9##SLP##27]  87.38,36.07 0 bottom
U$102  [#TXO#D13#13]  65.28,51.31 0 bottom
U$103  [#RXI#D14#15]  64.9,48.77 0 bottom
U$104  [##RST##15]  63.37,43.69 0 bottom
U$105  [#RSSI#D10#17]  65.15,41.15 0 bottom
U$106  [#SDA#D11#8]  65.02,38.61 0 bottom
U$107  [#VBAT#5]  71.37,22.1 0 top
U$108  [#GND#0]  79.88,22.1 0 top
U$109  [UART32]  86.11,16.89 0 top
U$110  [#RST#30]  56.51,55.88 0 top
U$111  [SFE_LOGO_NAME_.2]  75.95,69.09 0 bottom
U$112  [SFE_LOGO_FLAME_.2]  56.9,60.2 0 top
U$113  [RSSI31]  58.5,16.76 0 top
U$114  [#RLED#22]  59.05,19.94 0 bottom
U$115  [#POCI#D12#24]  65.41,46.23 0 bottom
U$116  [#POCI#23]  57.86,46.23 0 top
U$117  [##DTR##27]  58.04,33.53 0 top
U$118  [#EN#17]  93.22,28.45 0 top
U$119  [#EN#17]  89.15,28.45 0 bottom
U$120  [#NC#1]  89.03,38.61 0 bottom
U$121  [#NC#3]  62.86,36.07 0 bottom
U$122  [#NC#3]  58.55,36.07 0 top
U$123  [#NC#1]  93.34,38.61 0 top
U$124  [DIRECT_USB33]  65.79,17.02 0 top
U$125  [DEVELOPMENT1345]  75.95,64.64 0 top
U$126  [BOARD1346]  75.95,62.74 0 top
U$127  [DEVELOPMENT1345]  75.95,64.64 0 bottom
U$128  [BOARD1346]  75.95,62.74 0 bottom
U$129  [#DUSB#31]  60.83,24.38 0 top
U$130  [XBEE339]  75.95,66.55 0 bottom
U$131  [XBEE339]  75.95,66.55 0 top
U$132  [#D1#AD1#SCL#8]  85.6,51.31 0 bottom
U$133  [#D8##DTR##27]  64.77,33.53 0 bottom
U$134  [ASC32]  58.5,18.29 0 top
U$135  [#D2#AD2#SCLK#19]  84.84,48.77 0 bottom
U$136  [CHG47]  78.23,25.4 0 top
U$137  [IO46]  58.27,15.39 0 top
U$138  [#SHLD#740]  84.96,12.95 0 bottom
U$139  [#SHLD1#741]  73.91,12.78 0 bottom
U$140  [#IOLED#23]  59.31,16.76 0 bottom
U$141  [##CS##19]  46.99,112.78 0 top
U$142  [##CTS##25]  47.62,100.08 0 top
U$143  [##RTS##24]  47.62,110.24 0 top
U$144  [#3V3#1]  14.48,123.06 270 top
U$145  [#D0#18]  44.96,122.55 90 top
U$146  [#GND#0]  11.81,97.54 0 top
U$147  [#I2C#33]  48.77,90.42 0 bottom
U$148  [#PICO#23]  47.88,97.54 0 top
U$149  [#RSSI#16]  11.68,107.7 0 top
U$150  [#SDA#7]  11.81,105.16 0 top
U$151  [#GND#0]  33.66,88.65 0 bottom
U$152  [#D5#3]  46.99,107.7 0 top
U$153  [#VIN#4]  16.89,95 0 top
U$154  [PWR26]  12.55,78.46 90 top
U$155  [#3V3#1]  17.14,120.4 0 bottom
U$156  [#GND#0]  17.14,97.54 0 bottom
U$157  [#VIN#4]  16.89,95 0 bottom
U$158  [##SLP##27]  47.37,102.62 0 top
U$159  [#I2C#31]  13.97,88.39 0 top
U$160  [D03]  49.4,122.43 0 top
U$161  [##RST##15]  11.81,110.24 0 top
U$162  [#VBAT#5]  25.15,88.65 0 bottom
U$163  [#ALED#21]  12.95,89.66 0 bottom
U$164  [#PLED#20]  16.31,79.38 0 bottom
U$165  [#D0#AD0#18]  40.77,120.4 0 bottom
U$166  [#D3#AD3#22]  40.77,112.78 0 bottom
U$167  [#D4#PICO#24]  40.64,97.54 0 bottom
U$168  [#D5#ASSOC#24]  40,107.7 0 bottom
U$169  [#D6##RTS##24]  40.89,110.24 0 bottom
U$170  [#D7##CTS##25]  40.89,100.08 0 bottom
U$171  [#D9##SLP##27]  41.15,102.62 0 bottom
U$172  [#TXO#D13#13]  19.05,117.86 0 bottom
U$173  [#RXI#D14#15]  18.67,115.32 0 bottom
U$174  [##RST##15]  17.14,110.24 0 bottom
U$175  [#RSSI#D10#17]  18.92,107.7 0 bottom
U$176  [#SDA#D11#8]  18.8,105.16 0 bottom
U$177  [#VBAT#5]  25.15,88.65 0 top
U$178  [#GND#0]  33.66,88.65 0 top
U$179  [UART32]  39.88,83.44 0 top
U$180  [#RST#30]  10.29,122.43 0 top
U$181  [SFE_LOGO_NAME_.2]  29.72,135.64 0 bottom
U$182  [SFE_LOGO_FLAME_.2]  10.67,126.75 0 top
U$183  [RSSI31]  12.27,83.31 0 top
U$184  [#RLED#22]  12.83,86.49 0 bottom
U$185  [#POCI#D12#24]  19.18,112.78 0 bottom
U$186  [#POCI#23]  11.63,112.78 0 top
U$187  [##DTR##27]  11.81,100.08 0 top
U$188  [#EN#17]  46.99,95 0 top
U$189  [#EN#17]  42.93,95 0 bottom
U$190  [#NC#1]  42.8,105.16 0 bottom
U$191  [#NC#3]  16.64,102.62 0 bottom
U$192  [#NC#3]  12.32,102.62 0 top
U$193  [#NC#1]  47.12,105.16 0 top
U$194  [DIRECT_USB33]  19.56,83.57 0 top
U$195  [DEVELOPMENT1345]  29.72,131.19 0 top
U$196  [BOARD1346]  29.72,129.29 0 top
U$197  [DEVELOPMENT1345]  29.72,131.19 0 bottom
U$198  [BOARD1346]  29.72,129.29 0 bottom
U$199  [#DUSB#31]  14.61,90.93 0 top
U$200  [XBEE339]  29.72,133.1 0 bottom
U$201  [XBEE339]  29.72,133.1 0 top
U$202  [#D1#AD1#SCL#8]  39.37,117.86 0 bottom
U$203  [#D8##DTR##27]  18.54,100.08 0 bottom
U$204  [ASC32]  12.27,84.84 0 top
U$205  [#D2#AD2#SCLK#19]  38.61,115.32 0 bottom
U$206  [CHG47]  32,91.95 0 top
U$207  [IO46]  12.04,81.94 0 top
U$208  [#SHLD#740]  38.73,79.5 0 bottom
U$209  [#SHLD1#741]  27.69,79.32 0 bottom
U$210  [#IOLED#23]  13.08,83.31 0 bottom
U$211  [##CS##19]  93.22,112.78 0 top
U$212  [##CTS##25]  93.85,100.08 0 top
U$213  [##RTS##24]  93.85,110.24 0 top
U$214  [#3V3#1]  60.71,123.06 270 top
U$215  [#D0#18]  91.19,122.55 90 top
U$216  [#GND#0]  58.04,97.54 0 top
U$217  [#I2C#33]  95,90.42 0 bottom
U$218  [#PICO#23]  94.11,97.54 0 top
U$219  [#RSSI#16]  57.91,107.7 0 top
U$220  [#SDA#7]  58.04,105.16 0 top
U$221  [#GND#0]  79.88,88.65 0 bottom
U$222  [#D5#3]  93.22,107.7 0 top
U$223  [#VIN#4]  63.12,95 0 top
U$224  [PWR26]  58.78,78.46 90 top
U$225  [#3V3#1]  63.37,120.4 0 bottom
U$226  [#GND#0]  63.37,97.54 0 bottom
U$227  [#VIN#4]  63.12,95 0 bottom
U$228  [##SLP##27]  93.6,102.62 0 top
U$229  [#I2C#31]  60.2,88.39 0 top
U$230  [D03]  95.63,122.43 0 top
U$231  [##RST##15]  58.04,110.24 0 top
U$232  [#VBAT#5]  71.37,88.65 0 bottom
U$233  [#ALED#21]  59.18,89.66 0 bottom
U$234  [#PLED#20]  62.53,79.38 0 bottom
U$235  [#D0#AD0#18]  87,120.4 0 bottom
U$236  [#D3#AD3#22]  87,112.78 0 bottom
U$237  [#D4#PICO#24]  86.87,97.54 0 bottom
U$238  [#D5#ASSOC#24]  86.23,107.7 0 bottom
U$239  [#D6##RTS##24]  87.12,110.24 0 bottom
U$240  [#D7##CTS##25]  87.12,100.08 0 bottom
U$241  [#D9##SLP##27]  87.38,102.62 0 bottom
U$242  [#TXO#D13#13]  65.28,117.86 0 bottom
U$243  [#RXI#D14#15]  64.9,115.32 0 bottom
U$244  [##RST##15]  63.37,110.24 0 bottom
U$245  [#RSSI#D10#17]  65.15,107.7 0 bottom
U$246  [#SDA#D11#8]  65.02,105.16 0 bottom
U$247  [#VBAT#5]  71.37,88.65 0 top
U$248  [#GND#0]  79.88,88.65 0 top
U$249  [UART32]  86.11,83.44 0 top
U$250  [#RST#30]  56.51,122.43 0 top
U$251  [SFE_LOGO_NAME_.2]  75.95,135.64 0 bottom
U$252  [SFE_LOGO_FLAME_.2]  56.9,126.75 0 top
U$253  [RSSI31]  58.5,83.31 0 top
U$254  [#RLED#22]  59.05,86.49 0 bottom
U$255  [#POCI#D12#24]  65.41,112.78 0 bottom
U$256  [#POCI#23]  57.86,112.78 0 top
U$257  [##DTR##27]  58.04,100.08 0 top
U$258  [#EN#17]  93.22,95 0 top
U$259  [#EN#17]  89.15,95 0 bottom
U$260  [#NC#1]  89.03,105.16 0 bottom
U$261  [#NC#3]  62.86,102.62 0 bottom
U$262  [#NC#3]  58.55,102.62 0 top
U$263  [#NC#1]  93.34,105.16 0 top
U$264  [DIRECT_USB33]  65.79,83.57 0 top
U$265  [DEVELOPMENT1345]  75.95,131.19 0 top
U$266  [BOARD1346]  75.95,129.29 0 top
U$267  [DEVELOPMENT1345]  75.95,131.19 0 bottom
U$268  [BOARD1346]  75.95,129.29 0 bottom
U$269  [#DUSB#31]  60.83,90.93 0 top
U$270  [XBEE339]  75.95,133.1 0 bottom
U$271  [XBEE339]  75.95,133.1 0 top
U$272  [#D1#AD1#SCL#8]  85.6,117.86 0 bottom
U$273  [#D8##DTR##27]  64.77,100.08 0 bottom
U$274  [ASC32]  58.5,84.84 0 top
U$275  [#D2#AD2#SCLK#19]  84.84,115.32 0 bottom
U$276  [CHG47]  78.23,91.95 0 top
U$277  [IO46]  58.27,81.94 0 top
U$278  [#SHLD#740]  84.96,79.5 0 bottom
U$279  [#SHLD1#741]  73.91,79.32 0 bottom
U$280  [#IOLED#23]  59.31,83.31 0 bottom
U$281  [##CS##19]  46.99,179.32 0 top
U$282  [##CTS##25]  47.62,166.62 0 top
U$283  [##RTS##24]  47.62,176.78 0 top
U$284  [#3V3#1]  14.48,189.61 270 top
U$285  [#D0#18]  44.96,189.1 90 top
U$286  [#GND#0]  11.81,164.08 0 top
U$287  [#I2C#33]  48.77,156.97 0 bottom
U$288  [#PICO#23]  47.88,164.08 0 top
U$289  [#RSSI#16]  11.68,174.24 0 top
U$290  [#SDA#7]  11.81,171.7 0 top
U$291  [#GND#0]  33.66,155.19 0 bottom
U$292  [#D5#3]  46.99,174.24 0 top
U$293  [#VIN#4]  16.89,161.54 0 top
U$294  [PWR26]  12.55,145.01 90 top
U$295  [#3V3#1]  17.14,186.94 0 bottom
U$296  [#GND#0]  17.14,164.08 0 bottom
U$297  [#VIN#4]  16.89,161.54 0 bottom
U$298  [##SLP##27]  47.37,169.16 0 top
U$299  [#I2C#31]  13.97,154.94 0 top
U$300  [D03]  49.4,188.98 0 top
U$301  [##RST##15]  11.81,176.78 0 top
U$302  [#VBAT#5]  25.15,155.19 0 bottom
U$303  [#ALED#21]  12.95,156.21 0 bottom
U$304  [#PLED#20]  16.31,145.92 0 bottom
U$305  [#D0#AD0#18]  40.77,186.94 0 bottom
U$306  [#D3#AD3#22]  40.77,179.32 0 bottom
U$307  [#D4#PICO#24]  40.64,164.08 0 bottom
U$308  [#D5#ASSOC#24]  40,174.24 0 bottom
U$309  [#D6##RTS##24]  40.89,176.78 0 bottom
U$310  [#D7##CTS##25]  40.89,166.62 0 bottom
U$311  [#D9##SLP##27]  41.15,169.16 0 bottom
U$312  [#TXO#D13#13]  19.05,184.4 0 bottom
U$313  [#RXI#D14#15]  18.67,181.86 0 bottom
U$314  [##RST##15]  17.14,176.78 0 bottom
U$315  [#RSSI#D10#17]  18.92,174.24 0 bottom
U$316  [#SDA#D11#8]  18.8,171.7 0 bottom
U$317  [#VBAT#5]  25.15,155.19 0 top
U$318  [#GND#0]  33.66,155.19 0 top
U$319  [UART32]  39.88,149.99 0 top
U$320  [#RST#30]  10.29,188.98 0 top
U$321  [SFE_LOGO_NAME_.2]  29.72,202.18 0 bottom
U$322  [SFE_LOGO_FLAME_.2]  10.67,193.29 0 top
U$323  [RSSI31]  12.27,149.86 0 top
U$324  [#RLED#22]  12.83,153.03 0 bottom
U$325  [#POCI#D12#24]  19.18,179.32 0 bottom
U$326  [#POCI#23]  11.63,179.32 0 top
U$327  [##DTR##27]  11.81,166.62 0 top
U$328  [#EN#17]  46.99,161.54 0 top
U$329  [#EN#17]  42.93,161.54 0 bottom
U$330  [#NC#1]  42.8,171.7 0 bottom
U$331  [#NC#3]  16.64,169.16 0 bottom
U$332  [#NC#3]  12.32,169.16 0 top
U$333  [#NC#1]  47.12,171.7 0 top
U$334  [DIRECT_USB33]  19.56,150.11 0 top
U$335  [DEVELOPMENT1345]  29.72,197.74 0 top
U$336  [BOARD1346]  29.72,195.83 0 top
U$337  [DEVELOPMENT1345]  29.72,197.74 0 bottom
U$338  [BOARD1346]  29.72,195.83 0 bottom
U$339  [#DUSB#31]  14.61,157.48 0 top
U$340  [XBEE339]  29.72,199.64 0 bottom
U$341  [XBEE339]  29.72,199.64 0 top
U$342  [#D1#AD1#SCL#8]  39.37,184.4 0 bottom
U$343  [#D8##DTR##27]  18.54,166.62 0 bottom
U$344  [ASC32]  12.27,151.38 0 top
U$345  [#D2#AD2#SCLK#19]  38.61,181.86 0 bottom
U$346  [CHG47]  32,158.5 0 top
U$347  [IO46]  12.04,148.49 0 top
U$348  [#SHLD#740]  38.73,146.05 0 bottom
U$349  [#SHLD1#741]  27.69,145.87 0 bottom
U$350  [#IOLED#23]  13.08,149.86 0 bottom
U$351  [##CS##19]  93.22,179.32 0 top
U$352  [##CTS##25]  93.85,166.62 0 top
U$353  [##RTS##24]  93.85,176.78 0 top
U$354  [#3V3#1]  60.71,189.61 270 top
U$355  [#D0#18]  91.19,189.1 90 top
U$356  [#GND#0]  58.04,164.08 0 top
U$357  [#I2C#33]  95,156.97 0 bottom
U$358  [#PICO#23]  94.11,164.08 0 top
U$359  [#RSSI#16]  57.91,174.24 0 top
U$360  [#SDA#7]  58.04,171.7 0 top
U$361  [#GND#0]  79.88,155.19 0 bottom
U$362  [#D5#3]  93.22,174.24 0 top
U$363  [#VIN#4]  63.12,161.54 0 top
U$364  [PWR26]  58.78,145.01 90 top
U$365  [#3V3#1]  63.37,186.94 0 bottom
U$366  [#GND#0]  63.37,164.08 0 bottom
U$367  [#VIN#4]  63.12,161.54 0 bottom
U$368  [##SLP##27]  93.6,169.16 0 top
U$369  [#I2C#31]  60.2,154.94 0 top
U$370  [D03]  95.63,188.98 0 top
U$371  [##RST##15]  58.04,176.78 0 top
U$372  [#VBAT#5]  71.37,155.19 0 bottom
U$373  [#ALED#21]  59.18,156.21 0 bottom
U$374  [#PLED#20]  62.53,145.92 0 bottom
U$375  [#D0#AD0#18]  87,186.94 0 bottom
U$376  [#D3#AD3#22]  87,179.32 0 bottom
U$377  [#D4#PICO#24]  86.87,164.08 0 bottom
U$378  [#D5#ASSOC#24]  86.23,174.24 0 bottom
U$379  [#D6##RTS##24]  87.12,176.78 0 bottom
U$380  [#D7##CTS##25]  87.12,166.62 0 bottom
U$381  [#D9##SLP##27]  87.38,169.16 0 bottom
U$382  [#TXO#D13#13]  65.28,184.4 0 bottom
U$383  [#RXI#D14#15]  64.9,181.86 0 bottom
U$384  [##RST##15]  63.37,176.78 0 bottom
U$385  [#RSSI#D10#17]  65.15,174.24 0 bottom
U$386  [#SDA#D11#8]  65.02,171.7 0 bottom
U$387  [#VBAT#5]  71.37,155.19 0 top
U$388  [#GND#0]  79.88,155.19 0 top
U$389  [UART32]  86.11,149.99 0 top
U$390  [#RST#30]  56.51,188.98 0 top
U$391  [SFE_LOGO_NAME_.2]  75.95,202.18 0 bottom
U$392  [SFE_LOGO_FLAME_.2]  56.9,193.29 0 top
U$393  [RSSI31]  58.5,149.86 0 top
U$394  [#RLED#22]  59.05,153.03 0 bottom
U$395  [#POCI#D12#24]  65.41,179.32 0 bottom
U$396  [#POCI#23]  57.86,179.32 0 top
U$397  [##DTR##27]  58.04,166.62 0 top
U$398  [#EN#17]  93.22,161.54 0 top
U$399  [#EN#17]  89.15,161.54 0 bottom
U$400  [#NC#1]  89.03,171.7 0 bottom
U$401  [#NC#3]  62.86,169.16 0 bottom
U$402  [#NC#3]  58.55,169.16 0 top
U$403  [#NC#1]  93.34,171.7 0 top
U$404  [DIRECT_USB33]  65.79,150.11 0 top
U$405  [DEVELOPMENT1345]  75.95,197.74 0 top
U$406  [BOARD1346]  75.95,195.83 0 top
U$407  [DEVELOPMENT1345]  75.95,197.74 0 bottom
U$408  [BOARD1346]  75.95,195.83 0 bottom
U$409  [#DUSB#31]  60.83,157.48 0 top
U$410  [XBEE339]  75.95,199.64 0 bottom
U$411  [XBEE339]  75.95,199.64 0 top
U$412  [#D1#AD1#SCL#8]  85.6,184.4 0 bottom
U$413  [#D8##DTR##27]  64.77,166.62 0 bottom
U$414  [ASC32]  58.5,151.38 0 top
U$415  [#D2#AD2#SCLK#19]  84.84,181.86 0 bottom
U$416  [CHG47]  78.23,158.5 0 top
U$417  [IO46]  58.27,148.49 0 top
U$418  [#SHLD#740]  84.96,146.05 0 bottom
U$419  [#SHLD1#741]  73.91,145.87 0 bottom
U$420  [#IOLED#23]  59.31,149.86 0 bottom
UART  USB Female Type C Connector  [USB-C-16P-4LAYER-ISOLATED]  39.88,16 0 top
UART1  USB Female Type C Connector  [USB-C-16P-4LAYER-ISOLATED]  86.11,16 0 top
UART2  USB Female Type C Connector  [USB-C-16P-4LAYER-ISOLATED]  39.88,82.55 0 top
UART3  USB Female Type C Connector  [USB-C-16P-4LAYER-ISOLATED]  86.11,82.55 0 top
UART4  USB Female Type C Connector  [USB-C-16P-4LAYER-ISOLATED]  39.88,149.1 0 top
UART5  USB Female Type C Connector  [USB-C-16P-4LAYER-ISOLATED]  86.11,149.1 0 top

## Library data of the parts
ALED ALED1-ALED5 I2C_PU I2C_PU1-I2C_PU5 IOLED IOLED1-IOLED5 PLED PLED1-PLED5 RLED RLED1-RLED5 SHLD SHLD1-SHLD11 = SparkFun-Jumpers
C1 C19 C34 C49 C64 C79 = SparkFun-Capacitors; PROD_ID: CAP-09824
C2 C4 C17 C18 C32 C33 C47 C48 C62 C63 C77 C78 = SparkFun-Capacitors; PROD_ID: CAP-14464
C3 C16 C31 C46 C61 C76 = SparkFun-Capacitors; PROD_ID: CAP-08604
C5 C9 C11 C14 C22 C24 C27 C28 C37 C39 C42 C43 C52 C54 C57 C58 C67 C69 C72 C73 C82 C84 C87 C88 = SparkFun-Capacitors; PROD_ID: CAP-00810
C6 C7 C20 C21 C35 C36 C50 C51 C65 C66 C80 C81 = SparkFun-Capacitors; PROD_ID: CAP-00867
C8 C29 C44 C59 C74 C89 = SparkFun-Capacitors; PROD_ID: CAP-08280
C10 C23 C38 C53 C68 C83 = SparkFun-Capacitors; PROD_ID: CAP-11015
C12 C25 C40 C55 C70 C85 = SparkFun-Capacitors; PROD_ID: CAP-11812
C13 C26 C41 C56 C71 C86 = SparkFun-Capacitors; PROD_ID: CAP-08913
C15 C30 C45 C60 C75 C90 = SparkFun-Capacitors; PROD_ID: CAP-14106
D1 D5 D12 D13 D20 D21 D28 D29 D36 D37 D44 D45 = SparkFun-DiscreteSemi; PROD_ID: DIO-14072
D2 D9 D17 D25 D33 D41 = SparkFun-LED; PROD_ID: DIO-17976
D3 D10 D18 D26 D34 D42 = SparkFun-LED; PROD_ID: DIO-08575
D4 D7 D14 D15 D22 D23 D30 D31 D38 D39 D46 D47 = SparkFun-LED; PROD_ID: DIO-09003
D6 D11 D19 D27 D35 D43 = SparkFun-DiscreteSemi; PROD_ID: DIO-09886
D8 D16 D24 D32 D40 D48 = SparkFun-LED; PROD_ID: DIO-00821
DIRECT_USB DIRECT_USB1-DIRECT_USB5 UART UART1-UART5 = SparkFun-Connectors; PROD_ID: CONN-14122
E$1-E$4 FD1-FD24 LOGO1-LOGO18 U$61 U$63 U$111 U$112 U$181 U$182 U$251 U$252 U$321 U$322 U$391 U$392 = SparkFun-Aesthetics
E$5 E$6 = SparkFun-Retired
H1-H24 = SparkFun-Hardware
J1 J8 J17 J25 J33 J41 = SparkFun-Connectors; PROD_ID: CONN-11443; SF_ID: PRT-08612
J2 J14 J22 J30 J38 J46 = xbee_smart_modem
J3 J5 J6 J9-J13 J15 J16 J18 J20 J21 J23 J24 J26 J28 J29 J31 J32 J34 J36 J37 J39 J40 J42 J44 J45 J47 J48 = SparkFun-Connectors
J4 J7 J19 J27 J35 J43 = SparkFun-Connectors; PROD_ID: CONN-13694
L1-L6 = SparkFun-Coils; PROD_ID: NDUC-18014
Q1-Q6 = SparkFun-DiscreteSemi; PROD_ID: TRANS-11308
R1 R27 R43 R59 R75 R91 = SparkFun-Resistors; PROD_ID: RES-07828
R2 R10 R12 R14 R15 R17 R22 R28 R33 R34 R38 R44 R49 R50 R54 R60 R65 R66 R70 R76 R81 R82 R86 R92 = SparkFun-Resistors; PROD_ID: RES-08272
R3 R20 R25 R26 R41 R42 R57 R58 R73 R74 R89 R90 = SparkFun-Resistors; PROD_ID: RES-00824
R4 R11 R21 R30 R37 R46 R53 R62 R69 R78 R85 R94 = SparkFun-Resistors; PROD_ID: RES-07857
R5 R29 R45 R61 R77 R93 = SparkFun-Resistors; PROD_ID: RES-07863
R6 R31 R47 R63 R79 R95 = SparkFun-Resistors; PROD_ID: RES-08296
R7 R8 R13 R16 R18 R19 R23 R24 R35 R36 R39 R40 R51 R52 R55 R56 R67 R68 R71 R72 R83 R84 R87 R88 = SparkFun-Resistors; PROD_ID: RES-12083
R9 R32 R48 R64 R80 R96 = SparkFun-Resistors; PROD_ID: RES-00818
S1 S2 S4 S5 S7 S8 S10 S11 S13 S14 S16 S17 = SparkFun-Switches; PROD_ID: SWCH-14139
S3 S6 S9 S12 S15 S18 = SparkFun-Switches; PROD_ID: SWCH-08179; SF_SKU: COM-00597
U1 U6 U13 U19 U25 U31 = SparkFun-IC-Special-Function; PROD_ID: IC-15569
U2 U8 U14 U20 U26 U32 = SparkFun-IC-Power; PROD_ID: VREG-15244
U3 U5 U9 U10 U15 U16 U21 U22 U27 U28 U33 U34 = SparkFun-DiscreteSemi; PROD_ID: IC-13538
U4 U12 U18 U24 U30 U36 = SparkFun-IC-Power; PROD_ID: IC-09995
U7 U11 U17 U23 U29 U35 = SparkFun-IC-Comms; PROD_ID: IC-11524
U$1-U$7 U$9-U$18 U$20 U$22 U$23 U$25-U$31 U$34-U$38 U$41-U$47 U$50 U$53-U$60 U$62 U$64 U$65 U$69 U$72-U$81 U$83-U$88 U$91-U$110 U$113-U$117 U$130-U$135 U$138-U$151 U$153-U$158 U$161-U$180 U$183-U$187 U$200-U$205 U$208-U$221 U$223-U$228 U$231-U$250 U$253-U$257 U$270-U$275 U$278-U$291 U$293-U$298 U$301-U$320 U$323-U$327 U$340-U$345 U$348-U$361 U$363-U$368 U$371-U$390 U$393-U$397 U$410-U$415 U$418-U$420 = top
U$8 U$21 U$24 U$51 U$52 U$67 U$68 U$70 U$71 U$118-U$120 U$123-U$128 U$188-U$190 U$193-U$198 U$258-U$260 U$263-U$268 U$328-U$330 U$333-U$338 U$398-U$400 U$403-U$408 = topmirror
U$19 U$33 U$136 U$137 U$206 U$207 U$276 U$277 U$346 U$347 U$416 U$417 = pot
U$32 U$48 U$66 U$121 U$122 U$129 U$191 U$192 U$199 U$261 U$262 U$269 U$331 U$332 U$339 U$401 U$402 U$409 = botmirror
U$39 U$40 U$49 U$82 U$89 U$90 U$152 U$159 U$160 U$222 U$229 U$230 U$292 U$299 U$300 U$362 U$369 U$370 = bot